# Allegro board RV233.brd
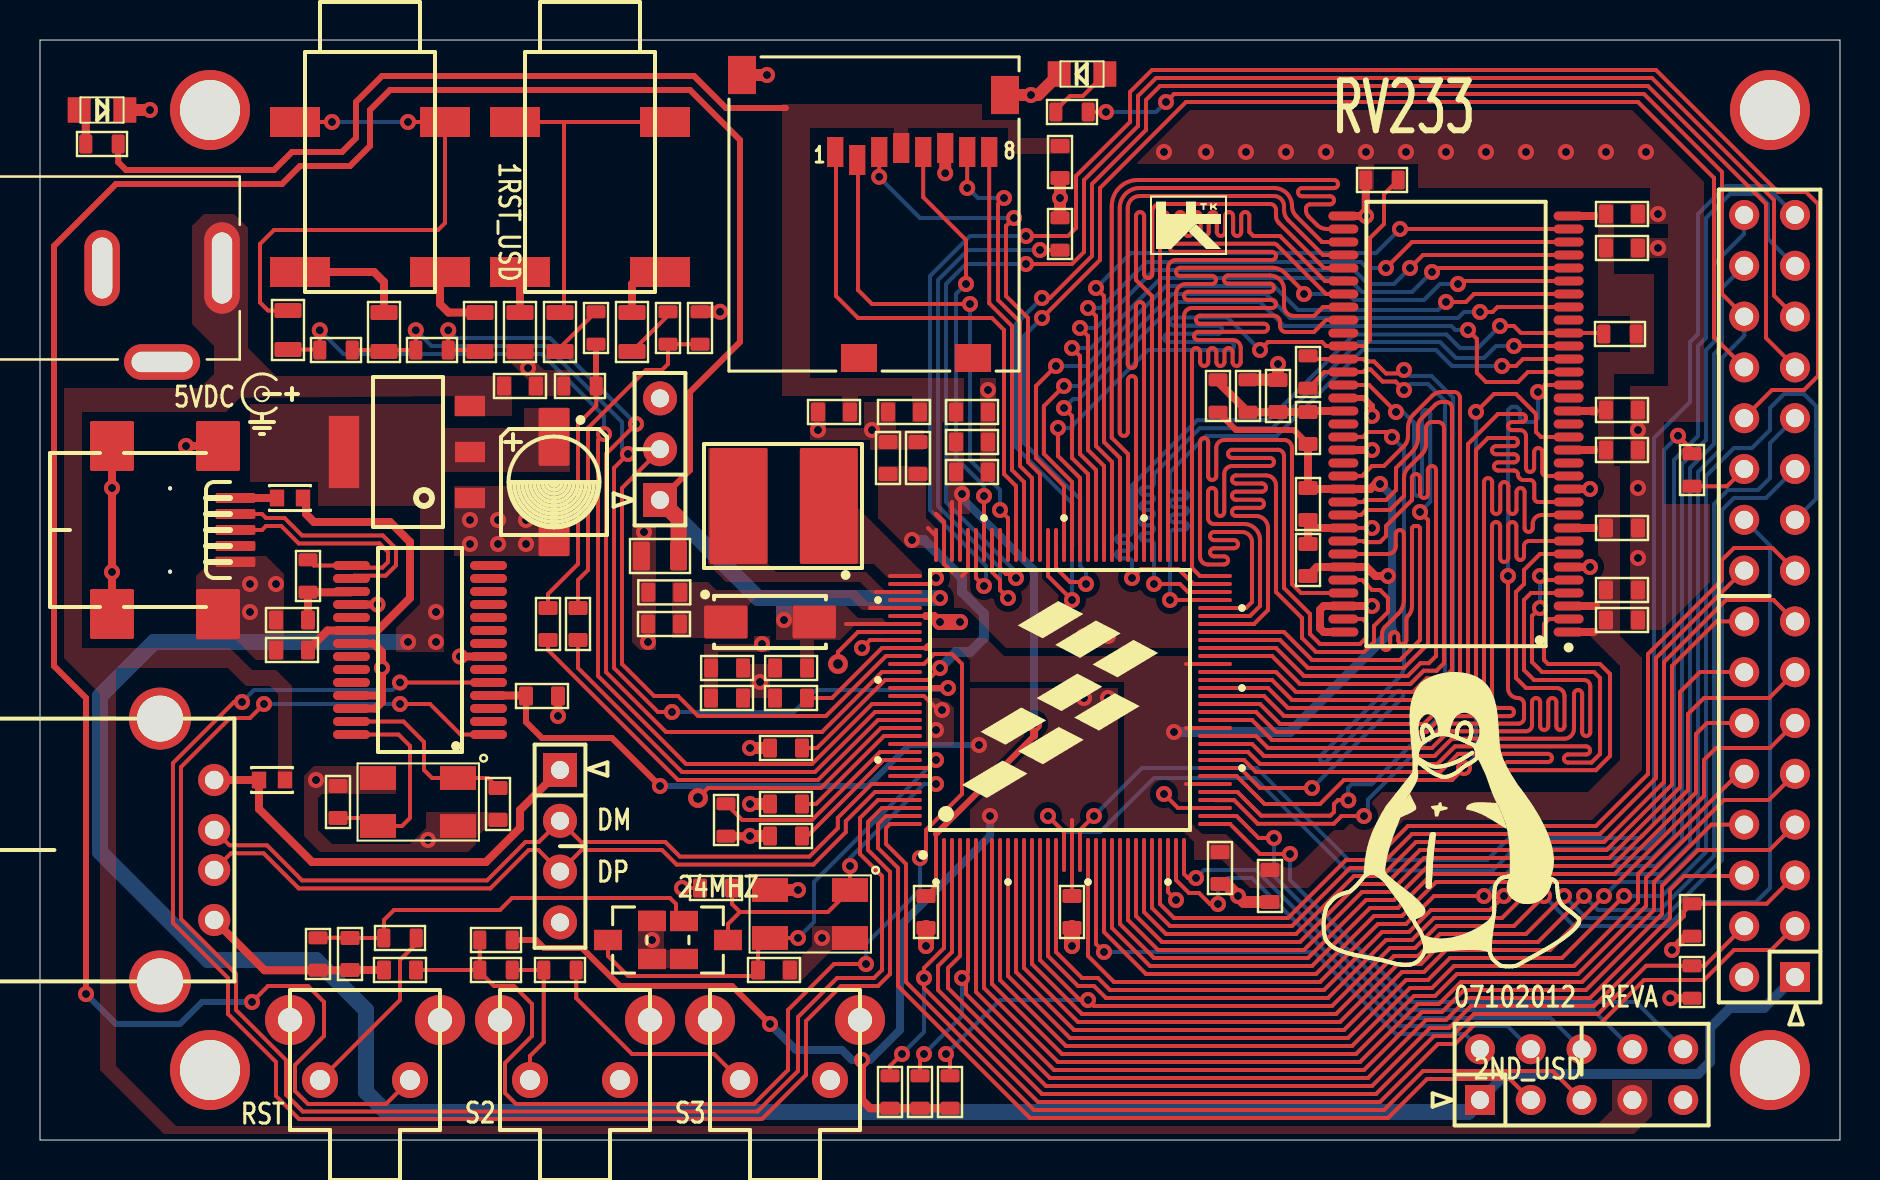
[diagram p0: board, top side]
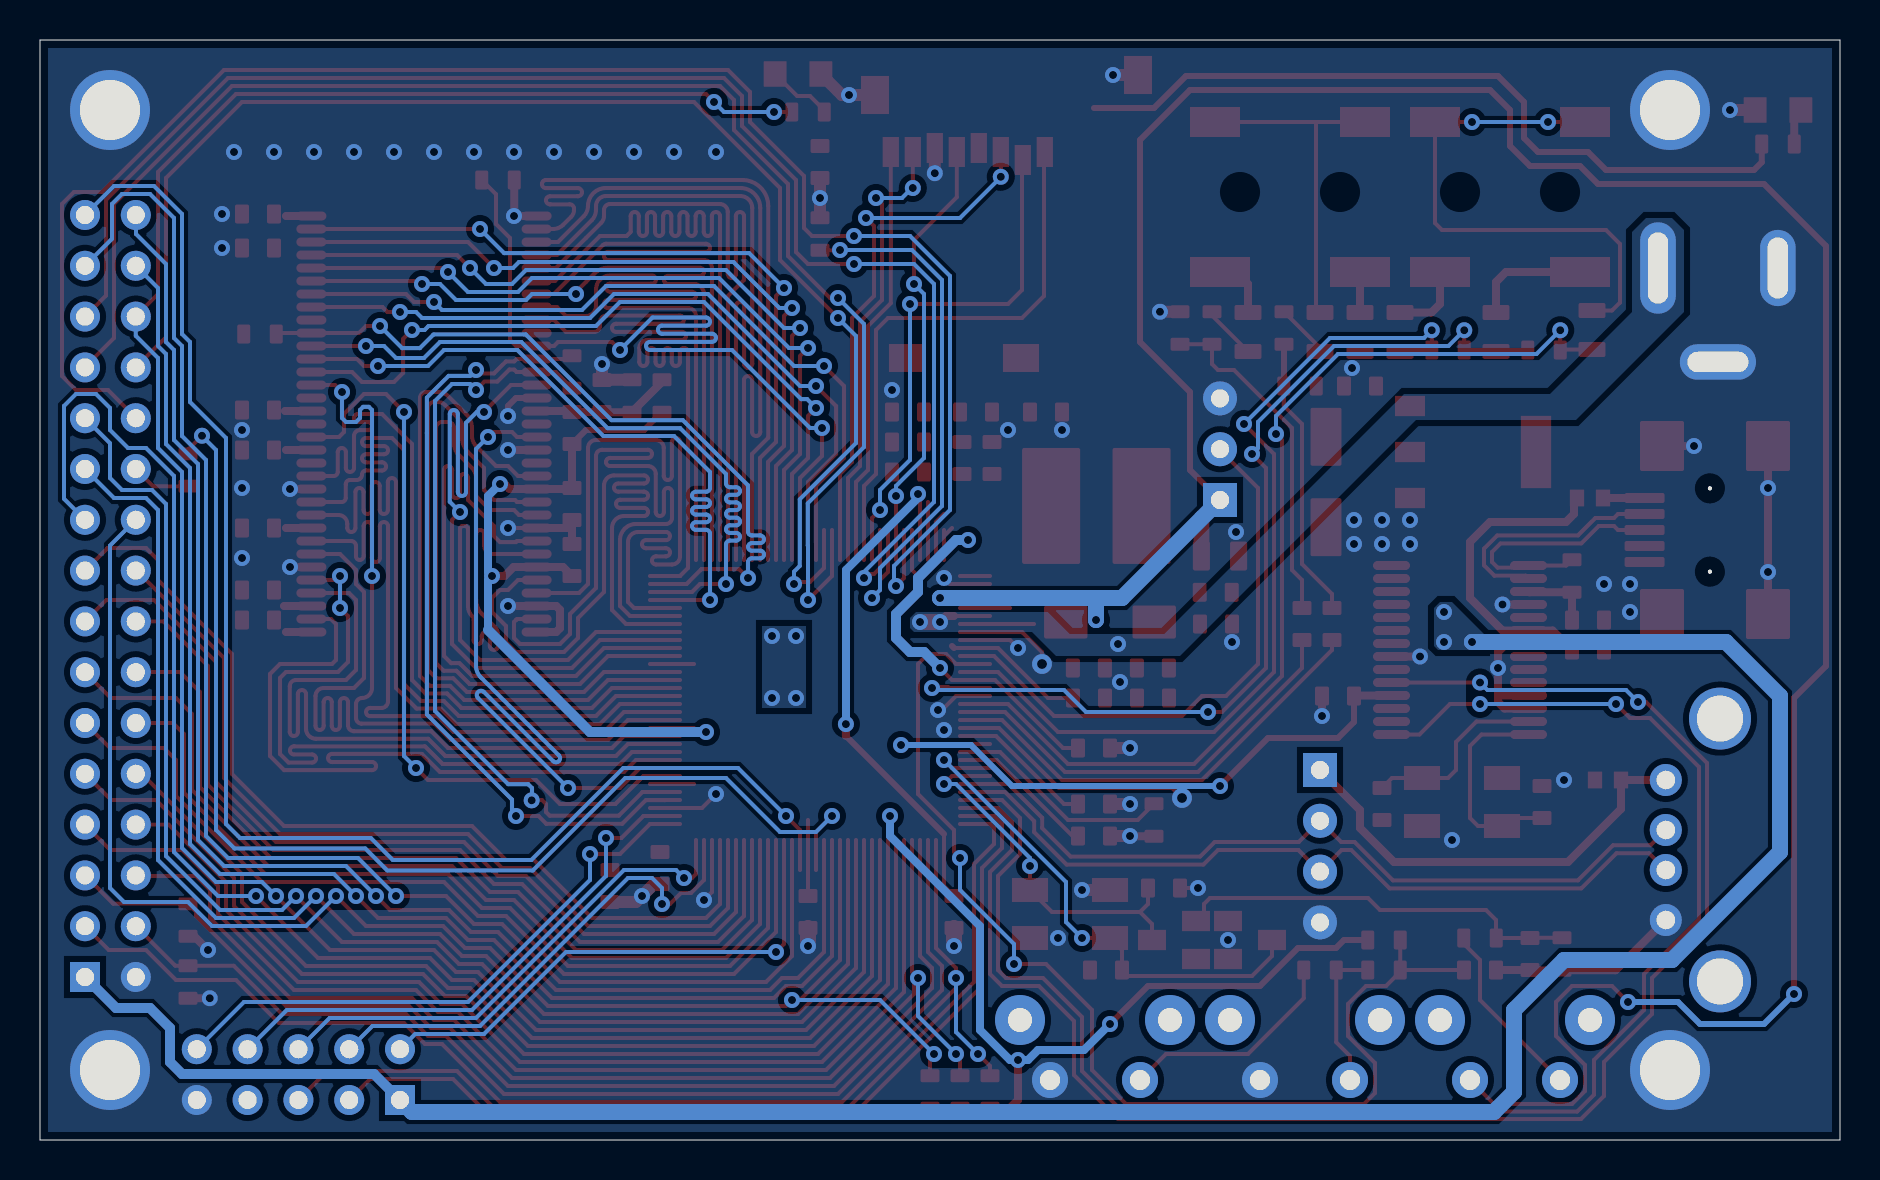
[diagram p1: board, bottom side, seen from below]

Outline 90 x 55 mm; copper layers: TOP, BOTTOM. Coordinates in mm from the lower left corner of the outline.
Outline path: 0,55 90,55 90,0 0,0 0,55

## Design rules (mm)
constraint set DEFAULT: 
net group DIFFPAIR0: nets EMI_CLK EMI_CLKN
net group EMI_ADDR: nets EMI_A00 EMI_A01 EMI_A02 EMI_A03 EMI_A04 EMI_A05 EMI_A06 EMI_A07 EMI_A08 EMI_A09 EMI_A10 EMI_A11 EMI_A12 EMI_BA0 EMI_BA1
net group EMI_CONTROL: nets EMI_CASN EMI_CE0N EMI_CKE EMI_RASN EMI_WEN
net group EMI_DATA: nets EMI_D00 EMI_D01 EMI_D02 EMI_D03 EMI_D04 EMI_D05 EMI_D06 EMI_D07 EMI_D08 EMI_D09 EMI_D10 EMI_D11 EMI_D12 EMI_D13 EMI_D14 EMI_D15 EMI_DQM0 EMI_DQM1 EMI_DQS0 EMI_DQS1

## Placement (name value [footprint] x y rotation side)
C1  100nF  [CAP0603_B1]  24 37.7 0 top
C2  100nF  [CAP0603_B1]  46.6 33.4 0 top
C3  22uF (0805)  [CAP0805_B1]  31 29.2 180 top
C4  10uF  [CAP0603_B1]  46.6 34.9 0 top
C5  33uF  [CAPAL53X54]  25.7 32.9 270 top
C6  100nF  [CAP0603_B1]  31.21 27.38 180 top
C7  10nF  [CAP0603_B1]  18 8.5 180 top
C8  100nF  [CAP0603_B1]  43.9 34.1 90 top
C10  100nF  [CAP0603_B1]  59 13.6 270 top
C11  10uF  [CAP0603_B1]  61.5 12.7 270 top
C12  10uF  [CAP0603_B1]  79.1 44.6 0 top
C13  100nF  [CAP0603_B1]  39.7 36.4 180 top
C14  100nF  [CAP0603_B1]  51.6 11.4 270 top
C15  10uF  [CAP0603_B1]  42.4 34.1 90 top
C16  10uF  [CAP0603_B1]  31.2 25.8 180 top
C17  100nF  [CAP0603_B1]  44.3 11.4 270 top
C20  100nF  [CAP0603_B1]  46.6 36.4 0 top
C22  10uF  [CAP0603_B1]  43.2 36.4 180 top
C23  1uF  [CAP0603_B1]  37.55 22.1 180 top
C24  100nF  [CAP0603_B1]  12.6 24.5 180 top
C25  100nF  [CAP0603_B1]  37.55 23.6 180 top
C27  22pF  [CAP0603_B1]  14.9 16.9 90 top
C28  10uF  [CAP0603_B1]  34.35 22.1 0 top
C29  100nF  [CAP0603_B1]  34.36 23.6 0 top
C30  100nF  [CAP0603_B1]  37.3 19.6 180 top
C31  22pF  [CAP0603_B1]  22.9 16.8 270 top
C32  100nF  [CAP0603_B1]  37.3 15.2 180 top
C33  1uF  [CAP0603_B1]  37.3 16.8 180 top
C34  22pF  [CAP0603_B1]  33.8 12.6 180 top
C35  22pF  [CAP0603_B1]  36.7 8.5 0 top
C36  100nF  [CAP0603_B1]  63.4 35.6 90 top
C37  100nF  [CAP0603_B1]  61.9 37.2 90 top
C38  100nF  [CAP0603_B1]  63.4 31.8 270 top
C39  100nF  [CAP0603_B1]  63.4 29 90 top
C40  100nF  [CAP0603_B1]  79.1 27.5 0 top
C41  100nF  [CAP0603_B1]  79.1 46.3 0 top
C42  100nF  [CAP0603_B1]  79.1 36.5 0 top
C43  100nF  [CAP0603_B1]  79.1 34.5 0 top
C44  100nF  [CAP0603_B1]  79.1 30.6 0 top
C45  100nF  [CAP0603_B1]  79.1 26 0 top
C46  100nF  [CAP0603_B1]  15.5 9.3 270 top
C47  100nF  [CAP0603_B1]  25.1 22.2 0 top
C48  100nF  [CAP0603_B1]  12.6 26 180 top
C49  1u  [CAP0603_B1]  26.9 25.8 270 top
C50  1u  [CAP0603_B1]  25.4 25.8 270 top
C51  1uF  [CAP0603_B1]  51 48.9 270 top
D1  -  [SS14]  36.5 25.9 0 top
D2  LED  [LED0805-1]  3.1 51.5 180 top
D3  LED  [LED0805-1]  52.1 53.3 0 top
FB5  Bead  [RES0805_B1]  22 40.4 90 top
FB6  Bead  [RES0805_B1]  12.4 40.5 90 top
FB7  Bead  [RES0805_B1]  17.2 40.4 90 top
FB8  Bead  [RES0805_B1]  29.6 40.4 90 top
FB9  Bead  [RES0805_B1]  26 40.4 90 top
FB10  Bead  [RES0805_B1]  24 40.4 90 top
HL1  HOLE  [HOLE-VIA]  8.5 51.5 0 top
HL2  HOLE  [HOLE-VIA]  86.5 51.5 0 top
HL3  HOLE  [HOLE-VIA]  86.5 3.5 0 top
HL4  HOLE  [HOLE-VIA]  8.5 3.5 0 top
J1  CON32A  [HDR254M-2X16]  87.75 8.15 90 top
J2  POWER_JACK  [CONN3-PWR-PJ102A]  9.1 43.6 180 top
J3  CON10A  [HDR254M-2X5]  72 2 0 top
J4  HP_OUT  [AUDIO_SMD_3P]  16.5 49.4 270 top
J5  LINE_IN  [AUDIO_SMD_3P]  27.5 49.4 270 top
J6  USB_MB  [HIROSE-US60-MB-5ST]  0.5 30.5 270 top
J7  USB_A  [EDAC-690-004]  6 14.5 270 top
J8  CON4  [HDR254M-1X4]  26 18.5 270 top
J9  CON3  [HDR254M-1X3]  31 32 90 top
L1  15uH  [INDUCTOR50X50]  37.18 31.7 180 top
L2  120OHM  [0603_CC]  12.5 32.1 180 top
L3  120OHM  [0603_CC]  11.6 18 180 top
NOREF  -  []  94 0 90 top
NOREF#2  -  []  0 59 0 top
NOREF#3  -  []  55.55 44.3 0 top
NOREF#4  -  []  46.1 17.1 0 top
NOREF#5  -  []  -1 45 0 top
NOREF#6  -  []  64.1 2.6 0 top
Q1  2SC1815-HF  [SOT-23]  33.3 10 270 top
Q2  2SC1815-HF  [SOT-23]  29.5 10 90 top
R4  100K  [RES0603_B1]  51 45.3 90 top
R5  47K  [RES0603_B1]  79 40.3 180 top
R6  1K  [RES0603_B1]  58.9 37.2 90 top
R7  1K  [RES0603_B1]  60.4 37.2 90 top
R8  100R (DNP)  [RES0603_B1]  63.4 38.4 90 top
R9  47K  [RES0603_B1]  67.1 48 180 top
R10  1K  [RES0603_B1]  18 10.1 180 top
R11  1K  [RES0603_B1]  13.9 9.3 270 top
R12  33R (DNP)  [RES0603_B1]  82.6 33.5 90 top
R13  47K  [RES0603_B1]  45.5 2.4 90 top
R14  47K  [RES0603_B1]  44 2.4 90 top
R15  47K  [RES0603_B1]  42.5 2.4 90 top
R16  47K  [RES0603_B1]  82.6 7.9 270 top
R17  47K  [RES0603_B1]  82.6 11 270 top
R18  10K  [RES0603_B1]  22.8 10 180 top
R19  0R  [RES0603_B1]  22.8 8.5 0 top
R20  910R  [RES0603_B1]  26 8.5 0 top
R23  100R  [RES0603_B1]  14.8 39.5 0 top
R24  100R  [RES0603_B1]  19.6 39.5 180 top
R25  10K  [RES0603_B1]  31.4 40.6 270 top
R26  10K  [RES0603_B1]  27.8 40.6 270 top
R27  4K7  [RES0603_B1]  27 37.7 180 top
R28  4K7  [RES0603_B1]  33 40.6 90 top
R39  100K  [RES0603_B1]  34.3 16 270 top
R40  1K5  [RES0603_B1]  13.4 28.2 90 top
R51  1K  [RES0603_B1]  3.1 49.8 180 top
R52  1K  [RES0603_B1]  51.6 51.4 180 top
S1  RST  [BUTTON_RST]  14 3 0 top
S2  S2  [BUTTON_RST]  24.5 3 0 top
S3  S3  [BUTTON_RST]  35 3 0 top
U1  i.MX233-128QFP  [LQFP128]  51 22 90 top
U2  HY5DU121622DTP-J  [TSOP66]  70.8 35.8 90 top
U3  SD/MMC SKT  [CON_SDCARD_12F_43_SM_RA]  41.7 46.3 0 top
U4  LD1117-3V3  [SSOT-223]  18.4 34.4 180 top
U5  -  [PL2303HX]  19 24.5 90 top
Y1  24MHz  [XTAL50X320X110N_MOD]  38.5 11.3 180 top
Y2  12MHz  [XTAL50X320X110N_MOD]  18.9 16.9 180 top

## Library data of the parts
C1-C4 C6-C8 C10-C17 C20 C22 C23 C25 C28-C30 C32-C46 C49-C51 = CAP NP_0: User Part Number: pn; Tolerance: RichardLC
C5 = CAPACITOR POL_1: User Part Number: pn; Tolerance: RichardLC
C24 C27 C31 C47 C48 = C1005_0: User Part Number: pn; Tolerance: RichardLC
D1 = DIODE SCHOTTKY_1: User Part Number: pn; Tolerance: RichardLC
D2 D3 = LED_0: Tolerance: X; User Part Number: X
FB5-FB10 L1 = INDUCTOR/SM_0: User Part Number: pn; Tolerance: RichardLC
HL1-HL4 = CON1: User Part Number: pn; Tolerance: RichardLC
J1 = CON32A: User Part Number: pn; Tolerance: RichardLC
J2 = POWER_JACK: Tolerance: X; User Part Number: X
J3 = CON10A: User Part Number: pn; Tolerance: RichardLC
J4 = PHONEJACK STEREO SW_5: User Part Number: pn; Tolerance: RichardLC
J5 = PHONEJACK STEREO SW_6: User Part Number: pn; Tolerance: RichardLC
J6 = CON9_2: User Part Number: pn; Tolerance: RichardLC
J7 = USB_A: User Part Number: pn; Tolerance: RichardLC
J8 = CON4: User Part Number: pn; Tolerance: RichardLC
J9 = CON3: User Part Number: pn; Tolerance: RichardLC
L2 L3 = BEAD
Q1 Q2 = 2N3904_0
R4-R20 R23-R28 R39 R40 R51 R52 = R_0: User Part Number: pn; Tolerance: RichardLC
S1-S3 = SW PUSHBUTTON_1: User Part Number: pn; Tolerance: RichardLC
U1 = stimpy_228: User Part Number: pn; Tolerance: RichardLC
U2 = MT48LC16M8A2_0: User Part Number: pn; Tolerance: RichardLC
U3 = CONN_SDCARD_1X12_F
U4 = LD1117
U5 = PL2303HX: User Part Number: pn; Tolerance: RichardLC
Y1 Y2 = ZTA_0

## Footprints (pads in the part's own frame, mm; a bottom-side part is the same pattern mirrored in y, then rotated)
0603_CC
  rect 0.711x0.838 smd: 1(-0.65,0) 2(0.65,0)
AUDIO_SMD_3P
  round 0 hole 1.4 unplated: (2,2.5) (2,-2.5)
  rect 1.5x3 smd: 1(6,-3.5) 2(6,3.5)
  rect 1.5x2.5 smd: 3(-1.5,3.75) 4(-1.5,-3.75)
BUTTON_RST
  round 1.8 hole 1: 1(0,0) 2(4.5,0)
  round 2.5 hole 1.2: 3(6,3) 4(-1.5,3)
CAP0603_B1
  custom 0.7x0.95 smd: 1(-0.8,0) 2(0.8,0)
CAP0805_B1
  custom 0.85x1.45 smd: 1(-0.93,0) 2(0.93,0)
CAPAL53X54
  custom 2.9x1.55 smd: 1(-2.26,0) 2(2.26,0)
CON_SDCARD_12F_43_SM_RA
  rect 0.813x1.499 smd: 1(-1.94,3.1) 2(-0.84,2.7) 3(0.26,3.1) 4(1.36,3.3) 5(2.46,3.1) 6(3.56,3.3) 7(4.66,3.1) 8(5.76,3.1)
  rect 1.397x1.905 smd: SH1(6.55,5.95) SH2(-6.6,6.95)
  rect 1.803x1.397 smd: SH3(4.95,-7.2) SH4(-0.75,-7.2)
CONN3-PWR-PJ102A
  oval 1.778x4.572 hole 1.016x3.556: 1(0,0)
  oval 1.778x3.81 hole 1.016x3.048: 2(5.994,0)
  oval 3.81x1.778 hole 3.048x1.016: 3(2.997,4.699)
EDAC-690-004
  round 1.6 hole 0.92: 1(-3.5,2.71) 2(-1,2.71) 3(1,2.71) 4(3.5,2.71)
  round 3.1 hole 2.3: S1(-6.57,0) S2(6.57,0)
HDR254M-1X3
  rect 1.7x1.7 hole 0.9: 1(0,0)
  round 1.7 hole 0.9: 2(2.54,0) 3(5.08,0)
HDR254M-1X4
  rect 1.7x1.7 hole 0.9: 1(0,0)
  round 1.7 hole 0.9: 2(2.54,0) 3(5.08,0) 4(7.62,0)
HDR254M-2X5
  rect 1.5x1.5 hole 0.9: 1(0,0)
  round 1.5 hole 0.9: 2(0,2.54) 3(2.54,0) 4(2.54,2.54) 5(5.08,0) 6(5.08,2.54) 7(7.62,0) 8(7.62,2.54) 9(10.16,0) 10(10.16,2.54)
HDR254M-2X16
  rect 1.5x1.5 hole 0.9: 1(0,0)
  round 1.5 hole 0.9: 2(0,2.54) 3(2.54,0) 4(2.54,2.54) 5(5.08,0) 6(5.08,2.54) 7(7.62,0) 8(7.62,2.54) 9(10.16,0) 10(10.16,2.54) 11(12.7,0) 12(12.7,2.54) 13(15.24,0) 14(15.24,2.54) 15(17.78,0) 16(17.78,2.54) 17(20.32,0) 18(20.32,2.54) 19(22.86,0) 20(22.86,2.54) 21(25.4,0) 22(25.4,2.54) 23(27.94,0) 24(27.94,2.54) 25(30.48,0) 26(30.48,2.54) 27(33.02,0) 28(33.02,2.54) 29(35.56,0) 30(35.56,2.54) 31(38.1,0) 32(38.1,2.54)
HIROSE-US60-MB-5ST
  round 0.2 hole 0.9 unplated: (-2.083,6.005) (2.083,6.005)
  custom 0.5x2 smd: 1(-1.6,9.271) 2(-0.8,9.271) 3(0,9.271) 4(0.8,9.271) 5(1.6,9.271)
  custom 2.5x2.2 smd: 6(-4.2,3.1) 7(4.2,3.1) 8(-4.2,8.4) 9(4.2,8.4)
HOLE-VIA
  round 0.1 hole 0.3: (-1.35,0) (-0.955,0.955) (-0.955,-0.955) (0,1.35) (0,-1.35) (0.955,0.955) (0.955,-0.955) (1.35,0) (1.35,0)
  round 4 hole 3: 1(0,0)
INDUCTOR50X50
  custom 2.9x5.8 smd: 1(-2.26,0) 2(2.26,0)
LED0805-1
  rect 1.143x1.27 smd: 1(-1.143,0) 2(1.143,0)
LQFP128
  oval 1.7x0.2 smd: 1(-7.75,6.2) 2(-7.75,5.8) 3(-7.75,5.4) 4(-7.75,5) 5(-7.75,4.6) 6(-7.75,4.2) 7(-7.75,3.8) 8(-7.75,3.4) 9(-7.75,3) 10(-7.75,2.6) 11(-7.75,2.2) 12(-7.75,1.8) 13(-7.75,1.4) 14(-7.75,1) 15(-7.75,0.6) 16(-7.75,0.2) 17(-7.75,-0.2) 18(-7.75,-0.6) 19(-7.75,-1) 20(-7.75,-1.4) 21(-7.75,-1.8) 22(-7.75,-2.2) 23(-7.75,-2.6) 24(-7.75,-3) 25(-7.75,-3.4) 26(-7.75,-3.8) 27(-7.75,-4.2) 28(-7.75,-4.6) 29(-7.75,-5) 30(-7.75,-5.4) 31(-7.75,-5.8) 32(-7.75,-6.2) 65(7.75,-6.2) 66(7.75,-5.8) 67(7.75,-5.4) 68(7.75,-5) 69(7.75,-4.6) 70(7.75,-4.2) 71(7.75,-3.8) 72(7.75,-3.4) 73(7.75,-3) 74(7.75,-2.6) 75(7.75,-2.2) 76(7.75,-1.8) 77(7.75,-1.4) 78(7.75,-1) 79(7.75,-0.6) 80(7.75,-0.2) 81(7.75,0.2) 82(7.75,0.6) 83(7.75,1) 84(7.75,1.4) 85(7.75,1.8) 86(7.75,2.2) 87(7.75,2.6) 88(7.75,3) 89(7.75,3.4) 90(7.75,3.8) 91(7.75,4.2) 92(7.75,4.6) 93(7.75,5) 94(7.75,5.4) 95(7.75,5.8) 96(7.75,6.2)
  oval 0.2x1.7 smd: 33(-6.2,-7.75) 34(-5.8,-7.75) 35(-5.4,-7.75) 36(-5,-7.75) 37(-4.6,-7.75) 38(-4.2,-7.75) 39(-3.8,-7.75) 40(-3.4,-7.75) 41(-3,-7.75) 42(-2.6,-7.75) 43(-2.2,-7.75) 44(-1.8,-7.75) 45(-1.4,-7.75) 46(-1,-7.75) 47(-0.6,-7.75) 48(-0.2,-7.75) 49(0.2,-7.75) 50(0.6,-7.75) 51(1,-7.75) 52(1.4,-7.75) 53(1.8,-7.75) 54(2.2,-7.75) 55(2.6,-7.75) 56(3,-7.75) 57(3.4,-7.75) 58(3.8,-7.75) 59(4.2,-7.75) 60(4.6,-7.75) 61(5,-7.75) 62(5.4,-7.75) 63(5.8,-7.75) 64(6.2,-7.75) 97(6.2,7.75) 98(5.8,7.75) 99(5.4,7.75) 100(5,7.75) 101(4.6,7.75) 102(4.2,7.75) 103(3.8,7.75) 104(3.4,7.75) 105(3,7.75) 106(2.6,7.75) 107(2.2,7.75) 108(1.8,7.75) 109(1.4,7.75) 110(1,7.75) 111(0.6,7.75) 112(0.2,7.75) 113(-0.2,7.75) 114(-0.6,7.75) 115(-1,7.75) 116(-1.4,7.75) 117(-1.8,7.75) 118(-2.2,7.75) 119(-2.6,7.75) 120(-3,7.75) 121(-3.4,7.75) 122(-3.8,7.75) 123(-4.2,7.75) 124(-4.6,7.75) 125(-5,7.75) 126(-5.4,7.75) 127(-5.8,7.75) 128(-6.2,7.75)
PL2303HX
  oval 0.45x1.85 smd: 1(-4.225,-3.425) 2(-3.575,-3.425) 3(-2.925,-3.425) 4(-2.275,-3.425) 5(-1.625,-3.425) 6(-0.975,-3.425) 7(-0.325,-3.425) 8(0.325,-3.425) 9(0.975,-3.425) 10(1.625,-3.425) 11(2.275,-3.425) 12(2.925,-3.425) 13(3.575,-3.425) 14(4.225,-3.425) 15(4.225,3.425) 16(3.575,3.425) 17(2.925,3.425) 18(2.275,3.425) 19(1.625,3.425) 20(0.975,3.425) 21(0.325,3.425) 22(-0.325,3.425) 23(-0.975,3.425) 24(-1.625,3.425) 25(-2.275,3.425) 26(-2.925,3.425) 27(-3.575,3.425) 28(-4.225,3.425)
RES0603_B1
  custom 0.65x0.95 smd: 1(-0.812,0) 2(0.812,0)
RES0805_B1
  custom 0.75x1.35 smd: 1(-0.975,0) 2(0.975,0)
SOT-23
  rect 1.016x1.397 smd: 1(-0.95,-1.1) 2(0.95,-1.1) 3(0,1.1)
SS14
  custom 2.17x1.65 smd: A(2.21,0) C(-2.21,0)
SSOT-223
  rect 1.5x1.02 smd: 1(-3.1,2.3) 2(-3.1,0) 3(-3.1,-2.3)
  rect 1.52x3.61 smd: 4(3.2,0)
TSOP66
  oval 0.45x1.5 smd: 1(-10.4,-5.632) 2(-9.75,-5.632) 3(-9.1,-5.632) 4(-8.45,-5.632) 5(-7.8,-5.632) 6(-7.15,-5.632) 7(-6.5,-5.632) 8(-5.85,-5.632) 9(-5.2,-5.632) 10(-4.55,-5.632) 11(-3.9,-5.632) 12(-3.25,-5.632) 13(-2.6,-5.632) 14(-1.95,-5.632) 15(-1.3,-5.632) 16(-0.65,-5.632) 17(0,-5.632) 18(0.65,-5.632) 19(1.3,-5.632) 20(1.95,-5.632) 21(2.6,-5.632) 22(3.25,-5.632) 23(3.9,-5.632) 24(4.55,-5.632) 25(5.2,-5.632) 26(5.85,-5.632) 27(6.5,-5.632) 28(7.15,-5.632) 29(7.8,-5.632) 30(8.45,-5.632) 31(9.1,-5.632) 32(9.75,-5.632) 33(10.4,-5.632) 34(10.4,5.632) 35(9.75,5.632) 36(9.1,5.632) 37(8.45,5.632) 38(7.8,5.632) 39(7.15,5.632) 40(6.5,5.632) 41(5.85,5.632) 42(5.2,5.632) 43(4.55,5.632) 44(3.9,5.632) 45(3.25,5.632) 46(2.6,5.632) 47(1.95,5.632) 48(1.3,5.632) 49(0.65,5.632) 50(0,5.632) 51(-0.65,5.632) 52(-1.3,5.632) 53(-1.95,5.632) 54(-2.6,5.632) 55(-3.25,5.632) 56(-3.9,5.632) 57(-4.55,5.632) 58(-5.2,5.632) 59(-5.85,5.632) 60(-6.5,5.632) 61(-7.15,5.632) 62(-7.8,5.632) 63(-8.45,5.632) 64(-9.1,5.632) 65(-9.75,5.632) 66(-10.4,5.632)
XTAL50X320X110N_MOD
  rect 1.803x1.194 smd: 1(-2,-1.2) 2(2,-1.2) 3(2,1.2) 4(-2,1.2)

## Nets
3V3_EXT: C5.1 J1.1 J3.1 U4.2(VOUT) U4.4
5V_EXT: C1.1 C28.1 C29.1 J2.1(TIP) J3.7 L3.1 U1.102 U4.3
GND: C1.2 C2.2 C3.2 C4.2 C5.2 C6.2 C7.2 C8.2 C10.2 C11.2 C12.2 C13.2 C14.2 C15.2 C16.2 C17.2 C20.2 C22.2 C23.2 C24.2 C25.2 C27.2 C28.2 C29.2 C30.2 C31.2 C32.2 C33.2 C34.2 C35.2 C37.2 C38.2 C39.2 C40.2 C41.2 C42.2 C43.2 C44.2 C45.2 C46.2 C47.2 C48.2 C51.2 D2.1 D3.1 FB10.1 HL1.1 HL2.1 HL3.1 HL4.1 J1.2 J2.2 J2.3 J3.9 J6.5 J6.6 J6.7 J6.8 J6.9 J7.4 J8.4 J9.3 Q1.2(E) Q2.1 Q2.2(E) R4.2 R7.2 R9.2 R11.2 R16.2 R17.2 R27.2 R28.2 R39.2 S2.2 S3.2 U1.30 U1.35 U1.98 U1.105 U1.112 U1.118 U2.6 U2.12 U2.34 U2.48 U2.52 U2.58 U2.64 U2.66 U3.6(VSS) U3.SH1 U3.SH2 U4.1 U5.7 U5.18 U5.21 U5.25 U5.26 Y1.2 Y1.4 Y2.2 Y2.4
VBUS_USB: C24.1 L2.1 U5.20
VDD4P2: C6.1 C16.1 D1.C U1.101
VDDA (1.8V): C8.1 C15.1 C30.1 U1.96 U1.110
VDDD (1.2V): C2.1 C4.1 C17.1 U1.1 U1.93 U1.94
VDDIO (3.3V): C13.1 C14.1 C20.1 C22.1 C47.1 C51.1 R13.1 R14.1 R15.1 R18.1 R51.1 U1.18 U1.92 U1.95 U3.4 U5.4
VDDIO_DRAM: C10.1 C11.1 C12.1 C23.1 C36.1 C38.1 C39.1 C40.1 C41.1 C42.1 C43.1 C44.1 C45.1 R5.1 R6.1 U1.38 U1.45 U1.53 U1.106 U2.1 U2.3 U2.9 U2.15 U2.18 U2.33 U2.55 U2.61
VDDXTAL (1.0V): C32.1 U1.120
EMI_A00: U1.76 U2.29
EMI_A01: U1.75 U2.30
EMI_A02: U1.74 U2.31
EMI_A03: U1.73 U2.32
EMI_A04: U1.72 U2.35
EMI_A05: U1.71 U2.36
EMI_A06: U1.70 U2.37
EMI_A07: U1.69 U2.38
EMI_A08: U1.68 U2.39
EMI_A09: U1.67 U2.40
EMI_A10: U1.66 U2.28
EMI_A11: U1.65 U2.41
EMI_A12: U1.64 U2.42
EMI_BA0: U1.79 U2.26
EMI_BA1: U1.80 U2.27
EMI_CASN: U1.61 U2.22
EMI_CE0N: R5.2 U1.63 U2.24
EMI_CKE: R9.1 U1.78 U2.44
EMI_CLK: R8.2 U1.36 U2.45
EMI_CLKN: R8.1 U1.37 U2.46
EMI_D00: U1.41 U2.2
EMI_D01: U1.43 U2.4
EMI_D02: U1.42 U2.5
EMI_D03: U1.44 U2.7
EMI_D04: U1.47 U2.8
EMI_D05: U1.48 U2.10
EMI_D06: U1.49 U2.11
EMI_D07: U1.50 U2.13
EMI_D08: U1.51 U2.54
EMI_D09: U1.52 U2.56
EMI_D10: U1.54 U2.57
EMI_D11: U1.55 U2.59
EMI_D12: U1.57 U2.60
EMI_D13: U1.58 U2.62
EMI_D14: U1.60 U2.63
EMI_D15: U1.59 U2.65
EMI_DQM0: U1.46 U2.20
EMI_DQM1: U1.56 U2.47
EMI_DQS0: U1.39 U2.16
EMI_DQS1: U1.40 U2.51
EMI_RASN: U1.62 U2.23
EMI_WEN: U1.77 U2.21(W\E\)
GPMI_ALE: J1.29 U1.20
GPMI_CE0N: J1.25 U1.82
GPMI_CE1N: J1.26 U1.81
GPMI_CLE: J1.31 U1.19
GPMI_D00: J1.11 U1.22
GPMI_D01: J1.12 U1.23
GPMI_D02: J1.13 U1.24
GPMI_D03: J1.14 U1.25
GPMI_D04: J1.15 U1.27
GPMI_D05: J1.16 U1.26
GPMI_D06: J1.17 U1.29
GPMI_D07: J1.18 U1.28
GPMI_R/B#0: J3.6 U1.32
GPMI_R/B#1: J3.2 U1.21
GPMI_RE#: J3.4 U1.31
GPMI_WE#:: J3.10 U1.33
GPMI_WP#: J3.8 U1.34
HP_L: FB6.1 R23.1 U1.113
HP_R: FB5.1 R24.1 U1.109
HP_VGND: FB7.1 R23.2 R24.2 U1.111
I2C_SCL: J3.3 U1.127
I2C_SDA: J3.5 U1.128
LCD_CS: J1.19 U1.10
LCD_D00: J1.3 R15.2 U1.2
LCD_D01: J1.4 R16.1 U1.3
LCD_D02: J1.5 R17.1 U1.4
LCD_D03: J1.6 R14.2 U1.5
LCD_D04: J1.7 U1.6
LCD_D05: J1.8 U1.7
LCD_D06: J1.9 U1.8
LCD_D07: J1.10 U1.9
LCD_DOTCLK: R12.2 U1.17
LCD_EN: J1.28 R52.1 U1.11
LCD_HSYNC: J1.30 U1.15
LCD_RESET: J1.23 U1.12
LCD_RS: J1.20 R13.2 U1.14
LCD_VSYNC: J1.32 U1.16
LCD_WR: J1.21 U1.13
LI-ION_BATTERY: C3.1 C25.1 D1.A J9.1 S1.2 U1.100 U1.103
LINE_IN_L: C50.2 U1.115
LINE_IN_R: C49.2 U1.114
LRADC0: C7.1 R18.2 R19.1 U1.108
LRADC1: J9.2 U1.107
MIC: U1.116
PSWITCH: R39.1 U1.119
PWM0: U1.125 U5.1
PWM1: U1.126 U5.5
PWM2: J1.24 U1.91
SERIAL_JTAG: R4.1 U1.89
SSP1_CMD: U1.83 U3.3
SSP1_DATA0: U1.84 U3.7
SSP1_DATA1: U1.85 U3.8
SSP1_DATA2: U1.86 U3.1
SSP1_DATA3: U1.87 U3.2
SSP1_DETECT: J1.27 U1.88
SSP1_SCK: U1.90 U3.5
USB_D+: J7.3 J8.3 U1.124
USB_D-: J7.2 J8.2 U1.123
VDAC1: U1.104
XTAL_IN: C34.1 Q1.3 U1.122 Y1.1
XTAL_OUT: C35.1 Q2.3 U1.121(XTALO) Y1.3
N37298: L1.1 U1.97
N37305: L1.2 U1.99
N50407: C33.1 U1.117
N54014: C36.2 C37.1 R6.2 R7.1 U2.49
N97880: C46.1 Q1.1 R10.2 R11.1
N16793165: J6.2 U5.16
N16793167: J6.3 R40.2 U5.15
N16793210: C48.1 R40.1 U5.17
N16793237: C27.1 U5.28 Y2.3
N16793563: C31.1 U5.27 Y2.1
N16801292: J1.22 R12.1
N16805543: FB8.2 J5.2
N16805561: FB9.2 J5.3 J5.4
N16805563: FB10.2 J5.1
N16805589: FB8.1 R25.1
N16805607: FB9.1 R26.1
N16805609: C49.1 R25.2 R28.1
N16805613: C50.1 R26.2 R27.1
N16806139: FB7.2 J4.1
N16806142: FB6.2 J4.3 J4.4
N16806154: FB5.2 J4.2
N16806654: R10.1 S1.1
N16806833: R19.2 R20.1 S2.1
N16806835: R20.2 S3.1
N16808420: J7.1(VBUS) J8.1 L3.2
N16808921: J6.1(VBUS) L2.2
N16811750: D2.2 R51.2
N16813899: D3.2 R52.2

Pads without a net: J6 4; J7 S1 S2; S1 3 4; S2 3 4; S3 3 4; U2 14 17 19 25 43 50 53; U3 SH3 SH4; U5 2 3 6 8 9 10 11 12 13 14 19 22 23 24

## Via types
v1: diameter 0.8, hole 0.4, TOP to BOTTOM, 201 vias
v2: diameter 0.991, hole 0.495, TOP to BOTTOM, 2 vias

## Routing (per net, layer and track width the routed paths; a pad name or vN(x,y) marks a point on that pad's centre or on a via; arc(x,y) is an arc through that point)
3V3_EXT: length 120.6
  BOTTOM w0.5: J1.1 86.2,6.6 84.5,6.6 83.5,5.6 83.5,3.9 82.9,3.3 73.3,3.3 J3.1
  BOTTOM w0.8: v1(18.4,24.9) 5.7,24.9 3,22.2 3,14.4 8.4,9 13.8,9 16.3,6.5 16.3,2.4 17.3,1.4 71.4,1.4 J3.1
  vias: v1(19.8,26.4) v1(19.8,24.9)
5V_EXT: length 2.9
  TOP w0.2: 44.3,26.2 U1.102
  TOP w0.4: v1(45,25.9) 44.7,26.2 44.3,26.2
  TOP w0.8: v1(46,25.9) v1(45,25.9)
  vias: v1(36.1,24.8)
GND: length 86.5
  TOP w0.2: v1(41.1,24.6) 41.5,25 U1.105 ; v1(56.8,12) 56.4,12.4 U1.30 ; C34.2 v1(32.1,12.6) ; U1.35 56.9,16.6 v1(56.2,17.3) ; 44.8,21.6 44.2,22.2 U1.112 ; 44.4,19.8 U1.118
  TOP w0.203: U2.58 v1(66.6,30.6) ; U1.98 44.5,27.8 44.8,28.1 v1(44.8,28.1)
  TOP w0.3: v1(66.6,36.2) 66.6,36.7 66.2,37.1 U2.48
  TOP w0.4: 17.1,22.2 v1(17.1,23.6) 17.1,24.4 16.67,24.82 U5.21 ; 17.1,22.2 17.08,22.23 15.58,22.23 ; 17.1,22.2 17.1,21.9 16.77,21.57 U5.26 ; U2.34 v1(66.3,46.2) 66.29,46.21 R9.2 ; U5.7 v1(21,24.18) ; R16.2 v1(81.51,7.09) ; R39.2 35.49,15.19 v1(35.5,15.2) ; C47.2 v1(25.9,21.2) ; U2.12 v1(77.5,32.55) ; C7.2 C46.2 15.49,8.49 R11.2 11.22,8.49 J7.4 ; J6.8 v1(7.3,34.7) ; C38.2 63.4,30.6 ; 63.4,30.6 U2.58 ; 63.4,30.6 C39.2 ; R17.2 82.29,10.19 v1(81.6,9.5) ; 61.89,38.01 C37.2 ; U5.18 v1(16.88,26.77) ; U2.52 v1(66.6,34.5) ; J6.6 v1(3.6,32.6) v1(3.6,28.4) J6.7 ; v1(66.6,26.7) U2.64 64.19,26.7 64,26.51 64,25.59 64.19,25.4 U2.66 ; U2.6 v1(77.5,28.65)
  TOP w0.6: U3.SH1 v1(49.55,52.25) 49.91,52.25 50.96,53.3 ; C30.2 v1(35.5,19.6) ; D2.1 v1(5.5,51.5) ; C11.2 60.2,11.9 v1(59.9,12.2) 59.3,12.8 C10.2 ; R7.2 61.89,38.01 ; R28.2 v1(34,41.41) ; C32.2 v1(35.5,15.2) ; R4.2 v1(51,47.1) C51.2 ; U3.6 v1(45.26,48.34) ; v1(61.9,38.8) C37.2 ; C33.2 v1(35.5,16.8) ; U3.SH2 v1(36.35,53.25) ; Y1.2 v1(37.9,12.5)
  TOP w0.8: C14.2 v1(51.6,9.7) ; C17.2 v1(44.3,9.7)
  vias: v1(10.5,27.8) v1(10.5,26.4) v1(11.8,27.8) v1(13.8,18) v1(19.4,15) v1(21.5,31) v1(21.5,29.8) v1(22.9,31) v1(22.9,29.8) v1(24.3,31) v1(24.3,29.8) v1(24.4,38.6) v1(30.2,30.4) v1(30.4,24.9) v1(30.6,10) v1(36,22.9) v1(38.9,35.5) v1(39.1,10.1) v1(41.6,35.5) v1(44.8,20.5) v1(45.1,21.5) v1(47.4,37.5) v1(56.2,49.4) v1(58.3,49.4) v1(60.3,49.4) v1(62.3,49.4) v1(64.3,49.4) v1(66.3,49.4) v1(68.3,49.4) v1(70.3,49.4) v1(72.3,49.4) v1(74.3,49.4) v1(76.3,49.4) v1(78.3,49.4) v1(79.9,35.5) v1(79.9,32.6) v1(79.9,29.1) v1(80.3,49.4) v1(80.9,46.3) v1(80.9,44.6)
VBUS_USB: length 15.6
  TOP w0.4: L2.1 13.3,31.95 13.3,31.3 13.7,30.9 17.5,30.9 18.5,29.9 18.5,27.1 16.88,25.48 U5.20 14.38,25.48 C24.1
VDD4P2: length 1.8
  TOP w0.203: U1.101 41.5,26.6
VDDA (1.8V): length 19.1
  TOP w0.2: C30.1 38.85,19.6 42.25,23 U1.110 44.4,23 v1(45,23.6)
  TOP w0.203: U1.96 44.8,30.2 44.4,30.6
  BOTTOM w0.5: v1(43.6,30) 44.2,30 46.1,28.1 46.1,27.4 47.2,26.3 47.2,25.1 46.5,24.4 45.8,24.4 v1(45,23.6)
VDDD (1.2V): length 28.1
  TOP w0.2: 44.8,15.3 U1.1 44.8,12.7 C17.1
  TOP w0.203: U1.93 46,31.9 ; 45.6,31.9 U1.94
  TOP w0.3: 44.8,15.3 49.7,20.2
  TOP w0.4: 49.7,20.2 v1(49.7,20.8)
  BOTTOM w0.4: v1(46.1,32.3) 46.1,32.1 49.7,28.5 49.7,20.8 v1(49.7,20.8)
VDDIO (3.3V): length 116.5
  TOP w0.2: U1.95 45.2,28.8 45.6,28.4 ; 46.1,28.2 46.4,28.5 U1.92 ; 51.6,16 U1.18 C14.1
  TOP w0.203: 45.2,30.9 U1.95
  TOP w0.22: 44.8,31.3 45.2,30.9
  TOP w0.3: 37.3,51.6 34.3,51.6 32.7,53.2 17.1,53.2 15.8,51.9 15.8,50.1 15.1,49.4 12.6,49.4 11.7,48.5 4.3,48.5 3.91,48.89 R51.1 ; R18.1 24.8,10 25.2,9.6 27.1,9.6 29,7.7 34.6,7.7 v1(36.5,5.8) ; v1(31,17.7) 28.6,20.1 25.1,20.1 24.3,20.9 C47.1
  TOP w0.4: v1(41.1,4) 41.1,2 41.51,1.59 R15.1 R14.1 R13.1 ; U5.4 24.27,22.23 C47.1
  BOTTOM w0.3: v1(31,17.7) 41.4,17.7 43.45,19.75 v1(46.95,19.75)
  BOTTOM w0.4: v1(47.5,16.2) 47.5,15.2 43,10.7 43,5.5 41.5,4 v1(41.1,4) 40.6,4 40.1,4.5 37.8,4.5 v1(36.5,5.8)
  vias: v1(52.2,25.2) v1(52.2,22.1) v1(53.4,25.2) v1(53.4,22.1)
VDDIO_DRAM: length 55.4
  TOP w0.2: U1.45 57.3,20.6 ; U1.38 57.3,17.8 ; 44.3,24.6 U1.106 42.1,24.6 39.6,22.1 C23.1 ; U1.53 57.3,23.8
  TOP w0.3: C36.1 62.7,35.5 59.8,35.5 58.91,36.39 R6.1 ; 44.4,24.7 44.3,24.6
  TOP w0.4: v1(67,32.8) 66.77,32.8 66.52,32.55 U2.55 63.45,32.55 C38.1 C36.1 ; U2.18 77.75,36.45 ; U2.3 77.8,26.7 ; U2.15 77.7,34.5 ; U2.9 77.7,30.6 ; U2.33 77.7,46.2 ; v1(67.4,28.2) 66.77,28.2 66.32,28.65 U2.61 63.85,28.65 C39.1 ; U2.1 77.7,25.4
  BOTTOM w0.4: 67.6,25.5 67.6,28 v1(67.4,28.2) 67.6,28.4 67.6,32.2 v1(67,32.8)
  BOTTOM w0.5: 67.6,25.5 62.5,20.4 v1(56.7,20.4)
VDDXTAL (1.0V): length 6.7
  TOP w0.2: C32.1 38.37,15.2 42.17,19 U1.120
EMI_A00: length 37.4
  TOP w0.203: v1(51.6,39.6) 52,39.2 52,34.3 52.8,33.5 U1.76 ; v1(69.6,43.4) 69.8,43.6 U2.29
  BOTTOM w0.203: v1(69.6,43.4) 68.6,42.4 66.1,42.4 65.4,43.1 56.05,43.1 52.55,39.6 v1(51.6,39.6)
EMI_A01: length 37.9
  TOP w0.203: v1(52,40.6) 52.4,40.2 52.4,34.5 53.2,33.7 U1.75 ; v1(68.5,43.6) 69.15,44.25 U2.30
  BOTTOM w0.203: v1(68.5,43.6) 67.7,42.8 66.4,42.8 65.7,43.5 55.7,43.5 52.8,40.6 v1(52,40.6)
EMI_A02: length 38
  TOP w0.203: U1.74 53.6,33.9 52.8,34.7 52.8,41.2 v1(52.4,41.6) ; v1(67.3,43.6) 68.6,44.9 U2.31
  BOTTOM w0.203: v1(67.3,43.6) 66.35,43.6 66.05,43.9 55.33,43.9 53.03,41.6 v1(52.4,41.6)
EMI_A03: length 38.2
  TOP w0.203: U1.73 54,34.1 53.2,34.9 53.2,42.2 v1(52.8,42.6) ; v1(68,45.55) U2.32
  BOTTOM w0.203: v1(52.8,42.6) 54.55,44.34 66.8,44.34 v1(68,45.55)
EMI_A04: length 37.8
  TOP w0.203: U1.72 54.4,34.3 53.59,35.11 53.59,46.7 arc(53.97,47.62) 54.89,48 64.7,48 arc(64.9,47.8) 64.7,47.59 63.1,47.59 arc(62.9,47.39) 63.1,47.19 64.5,47.19 arc(64.7,46.98) 64.5,46.78 63.5,46.78 arc(63.36,46.72) 63.3,46.58 63.3,46.5 arc(63.34,46.32) 63.44,46.16 63.85,45.75 arc(64.07,45.6) 64.34,45.55 U2.35
EMI_A05: length 36.5
  TOP w0.203: U2.36 64.1,44.9 62.81,46.19 arc(62.66,46.42) 62.6,46.7 arc(62.34,47.34) 61.7,47.6 54.99,47.6 arc(54.28,47.31) 53.99,46.6 53.99,35.4 arc(54.19,35.2) 54.39,35.4 54.39,38 arc(54.6,38.2) 54.8,38 U1.71
EMI_A06: length 36.6
  TOP w0.203: U2.37 64.15,44.25 62.41,45.99 arc(62.26,46.22) 62.2,46.5 62.2,46.7 arc(62.05,47.05) 61.7,47.2 54.99,47.2 arc(54.56,47.02) 54.39,46.6 54.39,38.8 arc(54.59,38.6) 54.79,38.8 54.79,41.7 arc(55,41.9) 55.2,41.7 U1.70
EMI_A07: length 35.5
  TOP w0.203: U1.69 55.6,42.2 54.8,43 54.8,46.2 arc(55,46.4) 55.21,46.2 55.21,43.3 arc(55.41,43.1) 55.61,43.3 55.61,46.4 arc(55.73,46.68) 56.01,46.8 61.5,46.8 arc(61.71,46.71) 61.8,46.5 61.8,46.2 arc(61.84,46.02) 61.94,45.86 62.7,45.1 63.9,43.9 64.2,43.6 U2.38
EMI_A08: length 37.9
  TOP w0.203: U2.39 64.25,42.95 62,45.2 60.67,45.2 60.47,45.4 60.47,46.2 arc(60.26,46.4) 60.06,46.2 60.06,45.4 arc(59.86,45.2) 59.65,45.4 59.65,46.2 arc(59.45,46.4) 59.25,46.2 59.25,45.4 arc(59.05,45.2) 58.84,45.4 58.84,46.2 arc(58.64,46.4) 58.44,46.2 58.44,45.4 arc(58.23,45.2) 58.03,45.4 58.03,46.2 arc(57.83,46.4) 57.62,46.2 57.62,45.4 arc(57.42,45.2) 57.22,45.4 57.22,46.2 arc(57.02,46.4) 56.81,46.2 56.81,45.4 arc(56.61,45.2) 56.41,45.4 56.41,46.2 arc(56.2,46.4) 56,46.2 U1.68
EMI_A09: length 34.9
  TOP w0.203: U2.40 64.3,42.3 62.61,43.99 61.85,44.75 arc(61.78,44.8) 61.7,44.81 56.7,44.81 arc(56.5,44.61) 56.7,44.41 61.6,44.41 arc(61.8,44.2) 61.6,44 56.8,44 arc(56.52,43.88) 56.4,43.6 U1.67
EMI_A10: length 38
  TOP w0.203: U1.66 56.8,42.3 arc(56.95,42.65) 57.3,42.8 58.6,42.8 arc(58.8,43) 58.6,43.21 57,43.21 arc(56.8,43.41) 57,43.61 61.6,43.61 arc(61.96,43.54) 62.26,43.34 62.7,42.9 63.2,42.4 v1(63.2,42.3) ; U2.28 71.05,42.95 v1(70.9,42.8)
  BOTTOM w0.203: v1(70.9,42.8) 70,42.8 69.2,42 65.7,42 65.4,42.3 v1(63.2,42.3)
EMI_A11: length 36.5
  TOP w0.203: U2.41 64.15,41.65 63.7,41.2 62.7,41.2 arc(62.35,41.35) 62.2,41.7 62.2,42.52 arc(61.99,43.02) 61.5,43.22 59.4,43.22 arc(59.2,43.02) 59.4,42.82 61.5,42.82 arc(61.7,42.61) 61.5,42.41 57.4,42.41 arc(57.2,42.21) 57.4,42.01 61.6,42.01 arc(61.8,41.8) 61.6,41.6 57.6,41.6 arc(57.32,41.48) 57.2,41.2 U1.65
EMI_A12: length 37.8
  TOP w0.203: U1.64 58,28.2 57.6,28.6 57.6,39.4 arc(57.8,39.6) 58.01,39.4 58.01,38.9 arc(58.21,38.7) 58.41,38.9 58.41,39.4 arc(58.62,39.6) 58.82,39.4 58.82,38.9 arc(59.02,38.7) 59.22,38.9 59.22,39.4 arc(59.43,39.6) 59.63,39.4 59.63,38.9 arc(59.83,38.7) 60.04,38.9 60.04,39.6 arc(59.92,39.88) 59.64,40 57.9,40 arc(57.7,40.2) 57.9,40.41 61.2,40.41 arc(61.4,40.61) 61.2,40.81 58,40.81 arc(57.8,41.02) 58,41.22 61.68,41.22 arc(61.91,41.12) 62,40.9 62,40.7 arc(62.09,40.49) 62.3,40.4 63.7,40.4 64.3,41 U2.42
EMI_BA0: length 36.8
  TOP w0.203: v1(51.2,37.7) 50.2,36.7 50.2,34.3 51.6,32.9 U1.79 ; v1(72,41.4) 72.63,41.4 72.88,41.65 U2.26
  BOTTOM w0.203: v1(51.2,37.7) 52,37.7 56.6,42.3 61.3,42.3 62.5,41.1 70.9,41.1 71.2,41.4 v1(72,41.4)
EMI_BA1: length 38.1
  TOP w0.203: U2.27 71.7,42.3 71.3,41.9 v1(70.3,41.9) ; v1(50.8,38.7) 49.8,37.7 49.8,34.1 51.2,32.7 U1.80
  BOTTOM w0.203: v1(50.8,38.7) 52.3,38.7 56.3,42.7 61.7,42.7 62.9,41.5 69.9,41.5 v1(70.3,41.9)
EMI_CASN: length 36
  TOP w0.203: U1.61 v1(56.5,27) ; v1(73.1,38.7) 73.8,38.7 74.15,39.05 U2.22
  BOTTOM w0.203: v1(73.1,38.7) 70.6,38.7 69.8,39.5 66.13,39.5 61.83,35.2 58.3,35.2 56.5,33.4 56.5,32.6 arc(56.56,32.47) 56.69,32.41 57.21,32.41 arc(57.4,32.22) 57.21,32.03 56.69,32.03 arc(56.5,31.84) 56.69,31.65 57.21,31.65 arc(57.4,31.46) 57.21,31.27 56.69,31.27 arc(56.5,31.08) 56.69,30.89 57.21,30.89 arc(57.4,30.7) 57.21,30.51 56.69,30.51 arc(56.56,30.45) 56.5,30.32 v1(56.5,27)
EMI_CE0N: length 39.4
  TOP w0.2: R5.2 78.14,40.35 U2.24
  TOP w0.203: v1(54.6,28.1) 55.05,28.55 56.93,28.55 57.67,27.8 U1.63 ; U2.24 74.05,40.35 73.7,40.7 v1(73,40.7)
  BOTTOM w0.203: v1(54.6,28.1) 54.6,28.89 arc(54.54,29.03) 54.41,29.08 53.99,29.08 arc(53.8,29.27) 53.99,29.46 54.41,29.46 arc(54.6,29.66) 54.41,29.85 53.99,29.85 arc(53.8,30.04) 53.99,30.23 54.41,30.23 arc(54.54,30.28) 54.6,30.42 54.6,32.73 57.86,35.99 61.43,35.99 65.71,40.28 70.32,40.28 71,39.59 71.89,39.59 v1(73,40.7)
EMI_CKE: length 46.3
  TOP w0.2: U2.44 66.2,39.7 66.5,40 66.5,45.1 67.2,45.8 67.2,47.29 R9.1
  TOP w0.203: v1(61,39.5) 61.4,39.9 64.1,39.9 64.3,39.7 U2.44 ; v1(50.9,35.6) 50.9,34.2 52,33.1 U1.78
  BOTTOM w0.203: v1(50.9,35.6) 51.5,35.6 55.4,39.5 59.5,39.5 arc(59.7,39.7) 59.5,39.91 56.4,39.91 arc(56.2,40.11) 56.4,40.31 58.9,40.31 arc(59.1,40.52) 58.9,40.72 56.7,40.72 arc(56.5,40.92) 56.7,41.12 59.38,41.12 v1(61,39.5)
EMI_CLK: length 39.2
  TOP w0.203: U1.36 58.76,16.99 59.71,16.99 60.89,15.81 64.69,15.81 65.08,16.2 v1(66.2,16.2) ; v1(68.2,38.5) 68.03,38.33 67.3,38.33 66.7,38.93 66.29,38.93 66.17,39.05 U2.45 ; 65.13,39.01 U2.45 ; U2.45 63.56,39.05 R8.2
  BOTTOM w0.203: v1(68.2,38.5) 68.49,38.21 69.57,38.21 70.66,37.12 70.66,35.35 70.65,35.35 70.65,21.28 66.4,17.02 66.4,16.4 v1(66.2,16.2)
EMI_CLKN: length 38.4
  TOP w0.203: R8.1 64.21,38.4 U2.46 66.17,38.4 66.29,38.52 66.53,38.52 67.13,37.92 67.78,37.92 v1(68.2,37.5) ; U1.37 59.88,17.4 61.06,16.22 64.52,16.22 64.7,16.4 64.7,16.8 64.9,17 65.4,17 v1(65.42,16.98)
  BOTTOM w0.203: v1(65.42,16.98) 65.4,17 65.4,17.6 65.59,17.79 66.59,17.79 70.25,21.45 70.25,35.52 70.25,36.95 69.4,37.8 68.5,37.8 v1(68.2,37.5)
EMI_D00: length 36.8
  TOP w0.203: U1.41 60.2,19 60.8,18.4 70,18.4 70.91,19.3 75.4,19.3 arc(75.6,19.1) 75.4,18.9 73.4,18.9 arc(73.2,18.7) 73.4,18.49 77.79,18.49 78.5,19.2 78.5,23.3 78,23.8 75.4,23.8 75.2,24 75.2,25.8 75.45,26.05 U2.2
EMI_D01: length 35.6
  TOP w0.203: U1.43 60.6,19.8 61.2,19.2 69.73,19.2 70.59,20.06 76.2,20.06 arc(76.55,20.21) 76.7,20.56 76.7,22.3 arc(76.9,22.5) 77.11,22.3 77.11,20.4 arc(77.31,20.2) 77.51,20.4 77.51,22.69 arc(77.42,22.91) 77.2,23 74.7,23 74.2,23.5 74.2,27 74.55,27.35 U2.4
EMI_D02: length 36.6
  TOP w0.203: U2.5 75.2,28 v1(75,28.2) ; v1(75,26.6) 74.6,26.2 74.6,23.9 75.1,23.4 77.7,23.4 78,23.1 78,19.3 77.57,18.87 76.4,18.87 arc(76.2,19.07) 76.4,19.28 77.3,19.28 arc(77.5,19.48) 77.3,19.68 70.75,19.68 69.87,18.8 61,18.8 60.4,19.4 U1.42
  BOTTOM w0.203: v1(75,26.6) v1(75,28.2)
EMI_D03: length 36.4
  TOP w0.203: U1.44 60.8,20.2 61.4,19.6 69.6,19.6 70.44,20.44 74.3,20.44 arc(74.51,20.53) 74.6,20.74 74.6,21.9 arc(74.8,22.1) 75.01,21.9 75.01,20.7 arc(75.21,20.5) 75.41,20.7 75.41,21.9 arc(75.61,22.1) 75.82,21.9 75.82,20.7 arc(76.02,20.5) 76.22,20.7 76.22,22.2 arc(76.11,22.48) 75.82,22.6 74.3,22.6 73.8,23.1 73.8,27.4 74.2,27.8 74.2,28.5 75,29.3 U2.7
EMI_D04: length 36.1
  TOP w0.203: U2.8 74.45,29.95 arc(74.27,29.88) 74.2,29.7 74.2,29.18 arc(74.15,29.05) 74.02,29 arc(73.88,29.06) 73.82,29.2 73.82,30.7 arc(73.61,30.9) 73.41,30.7 73.41,29.1 arc(73.21,28.9) 73.01,29.1 73.01,30.7 arc(72.8,30.9) 72.6,30.7 72.6,21.94 arc(72.63,21.81) 72.7,21.7 arc(72.81,21.63) 72.94,21.6 72.94,21.6 73.5,21.6 arc(73.7,21.4) 73.5,21.2 70.12,21.2 69.33,20.4 61.8,20.4 60.8,21.4 U1.47
EMI_D05: length 37.5
  TOP w0.203: U1.48 61,21.8 62,20.8 69.19,20.8 69.97,21.57 71.17,21.57 72.2,22.6 72.2,32.9 arc(72.4,33.1) 72.61,32.9 72.61,31.5 arc(72.81,31.3) 73.01,31.5 73.01,32.7 arc(73.22,32.9) 73.42,32.7 73.42,31.5 arc(73.62,31.3) 73.82,31.5 73.82,32.4 arc(74.03,32.6) 74.23,32.4 74.23,30.6 arc(74.43,30.4) 74.64,30.6 74.64,30.81 arc(74.77,31.12) 75.08,31.25 U2.10
EMI_D06: length 37.8
  TOP w0.203: U1.49 61.2,22.2 62.2,21.2 69.06,21.2 69.81,21.95 70.95,21.95 71.8,22.8 71.8,34.5 72.4,35.1 73.7,35.1 arc(73.9,34.9) 73.7,34.69 72.8,34.69 arc(72.6,34.49) 72.8,34.29 73.7,34.29 arc(73.9,34.09) 73.7,33.88 72.9,33.88 arc(72.7,33.68) 72.9,33.48 73.7,33.48 arc(73.84,33.42) 73.9,33.27 arc(73.98,33.08) 74.17,33 74.5,33 arc(74.65,32.94) 74.71,32.79 74.71,32.1 arc(74.77,31.96) 74.91,31.9 U2.11
EMI_D07: length 37.5
  TOP w0.203: U2.13 75.31,33.2 arc(75.17,33.26) 75.11,33.4 75.11,34.4 arc(74.91,34.6) 74.71,34.4 74.71,33.6 arc(74.5,33.4) 74.3,33.6 74.3,35.2 arc(74.21,35.41) 74.01,35.49 73.6,35.49 arc(73.4,35.7) 73.6,35.9 74.1,35.9 arc(74.24,35.96) 74.3,36.1 arc(74.24,36.24) 74.1,36.3 72.9,36.3 71.4,34.8 71.4,23 70.73,22.33 69.65,22.33 68.92,21.6 62.4,21.6 61.4,22.6 U1.50
EMI_D08: length 35.3
  TOP w0.203: U2.54 66.1,33.2 66.6,33.7 67.2,33.7 68.2,34.7 arc(68.35,34.92) 68.4,35.18 68.4,35.6 arc(68.47,35.97) 68.68,36.28 69.6,37.2 arc(69.82,37.35) 70.08,37.4 70.7,37.4 arc(70.91,37.31) 71,37.1 71,23.2 70.51,22.71 69.5,22.71 68.79,22 62.6,22 61.6,23 U1.51
EMI_D09: length 34.8
  TOP w0.203: U1.52 61.8,23.4 62.8,22.4 68.65,22.4 69.34,23.09 70.19,23.09 70.6,23.5 70.6,36.6 arc(70.51,36.81) 70.3,36.9 70.1,36.9 arc(69.92,36.86) 69.76,36.76 69.6,36.6 69.04,36.04 arc(68.94,35.88) 68.9,35.7 68.9,35.12 arc(68.82,34.73) 68.6,34.4 67.8,33.6 67.8,32.5 67.3,32 66.25,32 66.15,31.9 U2.56
EMI_D10: length 32.7
  TOP w0.203: U1.54 61.6,24.2 63,22.8 68.52,22.8 69.18,23.46 69.82,23.46 70.2,23.84 70.2,35.6 arc(70.11,35.81) 69.9,35.9 69.6,35.9 arc(69.39,35.81) 69.3,35.6 69.3,34.78 arc(69.25,34.52) 69.1,34.3 68.4,33.6 arc(68.25,33.38) 68.2,33.12 68.2,32.2 67.5,31.5 66.3,31.5 66.05,31.25 U2.57
EMI_D11: length 31
  TOP w0.203: U1.55 61.8,24.6 63.2,23.2 68.38,23.2 69.02,23.84 69.44,23.84 69.8,24.2 69.8,33.5 arc(69.6,33.7) 69.39,33.5 69.39,32.29 arc(69.34,32.16) 69.2,32.1 arc(69.06,32.16) 69,32.3 69,33.1 arc(68.8,33.3) 68.59,33.1 68.6,33.09 68.6,32 67.31,30.7 67.31,30.2 67,29.89 66.2,29.89 66.15,29.95 U2.59
EMI_D12: length 35.7
  TOP w0.203: U2.60 67.39,29.3 arc(67.67,29.42) 67.79,29.7 67.79,30.3 arc(67.99,30.5) 68.19,30.3 68.19,27 arc(68.12,26.62) 67.91,26.31 67.25,25.65 arc(67.14,25.48) 67.1,25.29 67.1,24.7 arc(67.3,24.5) 67.51,24.7 67.51,25.2 arc(67.71,25.4) 67.91,25.2 67.91,24.99 arc(68.11,24.79) 68.32,24.99 68.32,26 arc(68.34,26.11) 68.4,26.2 arc(68.55,26.42) 68.6,26.68 68.6,30.6 68.7,30.7 68.9,30.7 69,30.6 69,25 68,24 63.6,24 62.2,25.4 U1.57
EMI_D13: length 36.8
  TOP w0.203: U1.58 60.7,25.8 61.4,26.5 61.4,30.6 arc(61.22,31.02) 60.8,31.2 59.8,31.2 arc(59.6,31.4) 59.8,31.61 61,31.61 arc(61.2,31.81) 61,32.01 59.8,32.01 arc(59.6,32.22) 59.8,32.42 61.1,32.42 arc(61.3,32.62) 61.1,32.82 59.8,32.82 arc(59.6,33.03) 59.8,33.23 61.3,33.23 arc(61.65,33.08) 61.8,32.73 61.8,27.4 63.1,26.1 63.1,25.1 63.8,24.4 66.2,24.4 66.7,24.9 66.7,25.7 67.4,26.4 67.4,27.1 67,27.5 66.6,27.5 66.1,28 U2.62
EMI_D14: length 37.5
  TOP w0.203: U1.60 60.3,26.6 60.6,26.9 60.6,29.9 arc(60.45,30.25) 60.1,30.4 58.7,30.4 arc(58.5,30.2) 58.7,29.99 59.7,29.99 arc(59.9,29.79) 59.7,29.59 58.7,29.59 arc(58.5,29.38) 58.7,29.18 59.2,29.18 arc(59.4,28.98) 59.2,28.78 58.4,28.78 arc(58.12,28.89) 58,29.18 58,34.9 arc(58.2,35.1) 58.41,34.9 58.41,33.2 arc(58.61,33) 58.81,33.2 58.81,34.6 arc(58.93,34.88) 59.21,35 62.2,35 arc(62.48,34.88) 62.6,34.6 62.6,27.8 63.05,27.35 U2.63
EMI_D15: length 37.5
  TOP w0.203: U2.65 66.15,26.05 66.2,26 66.2,26 66.3,25.9 66.3,25.1 66,24.8 64,24.8 63.5,25.3 63.5,26.3 62.2,27.6 62.2,34.21 arc(62.11,34.42) 61.9,34.51 59.6,34.51 arc(59.4,34.31) 59.6,34.1 61.5,34.1 arc(61.64,34.04) 61.7,33.9 arc(61.64,33.76) 61.5,33.7 59.61,33.7 arc(59.33,33.58) 59.21,33.3 59.21,31.4 arc(59.01,31.2) 58.81,31.4 58.81,32.4 arc(58.6,32.6) 58.4,32.4 58.4,31.1 arc(58.49,30.89) 58.7,30.8 60.2,30.8 arc(60.77,30.57) 61,30 61,26.7 60.5,26.2 U1.59
EMI_DQM0: length 37.4
  TOP w0.203: v1(73.4,28.2) 73.4,22.6 arc(73.55,22.25) 73.9,22.1 arc(74.11,22.01) 74.2,21.8 74.2,21.1 arc(74.12,20.9) 73.92,20.82 70.28,20.82 69.46,20 61.6,20 60.6,21 U1.46 ; U2.20 75.25,37.75 v1(74.9,37.4)
  BOTTOM w0.203: v1(74.9,37.4) 74.9,36.1 74.7,35.9 74.2,35.9 74,36.1 74,36.5 73.84,36.66 73.56,36.66 73.4,36.5 v1(73.4,28.2)
EMI_DQM1: length 36.5
  TOP w0.203: v1(67.8,36.4) 66.45,37.75 U2.47 ; U1.56 62,25 63.4,23.6 68.2,23.6 69.4,24.8 69.4,31 v1(69,31.4)
  BOTTOM w0.203: v1(69,31.4) 69.51,31.91 69.51,36.3 arc(69.31,36.5) 69.11,36.3 69.11,32.4 arc(68.9,32.2) 68.7,32.4 68.7,35.86 68.16,36.4 v1(67.8,36.4)
EMI_DQS0: length 38.2
  TOP w0.203: v1(71.2,18.6) 70.6,18 65.2,18 64,16.8 61.23,16.8 59.83,18.2 U1.39 ; U2.16 75.05,35.15 74.8,35.4 74.8,36.3 73.8,37.3 72.7,37.3 v1(71.8,36.4)
  BOTTOM w0.203: v1(71.8,36.4) 71.8,19.2 v1(71.2,18.6)
EMI_DQS1: length 38.3
  TOP w0.203: U1.40 60,18.6 61,17.6 v1(63.6,17.6) ; v1(67.6,35.15) 67.35,35.4 66.4,35.4 66.15,35.15 U2.51
  BOTTOM w0.203: v1(67.6,35.15) 68.2,34.55 68.2,23.7 arc(68.14,23.4) 67.97,23.15 64.06,19.23 arc(64,19.09) 64.06,18.94 arc(64.2,18.88) 64.34,18.94 67.8,22.4 arc(68.1,22.4) 68.1,22.1 v1(63.6,17.6)
EMI_RASN: length 37.1
  TOP w0.203: U1.62 57.4,27.4 57,27.8 v1(55.7,27.8) ; v1(73.7,39.7) U2.23
  BOTTOM w0.203: v1(55.7,27.8) 55.7,29.78 arc(55.64,29.92) 55.51,29.97 55.19,29.97 arc(55,30.16) 55.19,30.35 55.51,30.35 arc(55.7,30.54) 55.51,30.73 55.19,30.73 arc(55,30.93) 55.19,31.12 55.51,31.12 arc(55.7,31.31) 55.51,31.5 55.19,31.5 arc(55,31.69) 55.19,31.88 55.51,31.88 arc(55.7,32.07) 55.51,32.26 55.19,32.26 arc(55,32.45) 55.19,32.64 55.51,32.64 arc(55.64,32.69) 55.7,32.83 55.7,33.3 57.99,35.59 61.63,35.59 65.93,39.9 70,39.9 70.8,39.1 72.2,39.1 72.8,39.7 v1(73.7,39.7)
EMI_WEN: length 37.6
  TOP w0.203: U1.77 52.4,33.3 51.6,34.1 51.6,35.5 51.6,35.51 51.6,36.09 51.6,36.1 51.6,36.2 v1(51.2,36.6) ; v1(71.4,40.5) 71.84,40.05 71.84,38.36 72.3,37.9 73.9,37.9 74.4,38.4 U2.21
  BOTTOM w0.203: v1(51.2,36.6) 51.65,37.05 51.95,37.05 56.8,41.9 61,41.9 62.2,40.7 70.57,40.7 70.77,40.5 v1(71.4,40.5)
GPMI_ALE: length 76.9
  TOP w0.2: U1.20 52.4,9.2 53.7,7.9 64,7.9 66.9,10.8 68.3,10.8 69.7,12.2 v1(72.2,12.2)
  BOTTOM w0.2: v1(72.2,12.2) 74.1,14.1 80.6,14.1 81.7,15.2 81.7,34 82.9,35.2 82.9,39.7 83.3,40.1 83.3,46.1 84.5,47.3 85.9,47.3 86.4,46.8 86.4,45.06 J1.29
GPMI_CE0N: length 74.9
  TOP w0.2: v1(51.6,27) 50.4,28.2 U1.82 ; v1(50.1,42.1) 50.5,42.1 52.6,44.2 52.6,47.8 55.3,50.5 55.3,52 56,52.7 80.4,52.7 86.3,46.8 86.3,40.1 87.75,38.65 J1.25
  BOTTOM w0.2: v1(50.1,42.1) 48.8,40.8 48.8,34.64 51.61,31.83 51.61,29.72 51.6,29.71 51.6,28.09 51.6,28.09 51.6,27.51 51.6,27.5 v1(51.6,27)
GPMI_CE1N: length 69.8
  TOP w0.2: U1.81 50.8,28.6 51.5,27.9 52.2,27.9 v1(52.3,27.8) ; J1.26 83.7,40.14 83.7,48.1 79.9,51.9 57.3,51.9 53,47.6 53,44 v1(50.1,41.1)
  BOTTOM w0.2: v1(50.1,41.1) 49.2,40.2 49.2,34.84 52.01,32.03 52.01,28.7 52.3,28.41 v1(52.3,27.8)
GPMI_CLE: length 71.3
  TOP w0.2: v1(52.7,16.2) 52,15.5 U1.19
  BOTTOM w0.2: J1.31 86.3,47.7 84.3,47.7 82.9,46.3 82.9,40.3 82.5,39.9 82.5,36.9 80.7,35.1 80.7,15.8 80,15.1 73.46,15.1 72.36,14 65.44,14 60.84,18.6 55.1,18.6 v1(52.7,16.2)
GPMI_D00: length 45.5
  TOP w0.2: U1.22 53.2,10.4 55.3,8.3 63.8,8.3 66.7,11.2 68.1,11.2 69.8,12.9 78.9,12.9 83.2,17.2 83.2,19 83.8,19.6 86.5,19.6 J1.11
GPMI_D01: length 42.8
  TOP w0.2: U1.23 53.6,10.6 55.5,8.7 63.6,8.7 66.5,11.6 67.9,11.6 69.6,13.3 78.73,13.3 82.8,17.37 82.8,20.3 83.35,20.85 J1.12
GPMI_D02: length 46
  TOP w0.2: J1.13 86.46,22.1 83.2,22.1 82.4,21.3 82.4,17.5 80.1,15.2 80.09,15.2 78.59,13.7 69.4,13.7 67.7,12 66.3,12 63.4,9.1 55.7,9.1 54,10.8 U1.24
GPMI_D03: length 43.2
  TOP w0.2: U1.25 54.4,11 55.9,9.5 63.2,9.5 66.1,12.4 67.5,12.4 69.2,14.1 78.46,14.1 82,17.64 82,22.4 83,23.4 85.2,23.4 J1.14
GPMI_D04: length 46.7
  TOP w0.2: U1.27 55.2,11.4 56.3,10.3 62.8,10.3 65.7,13.2 67.1,13.2 68.8,14.9 78.2,14.9 81.2,17.9 81.2,23.9 84.3,27 86.68,27 J1.15
GPMI_D05: length 44.1
  TOP w0.2: U1.26 54.8,11.2 56.1,9.9 63,9.9 65.9,12.8 67.3,12.8 69,14.5 78.33,14.5 81.6,17.77 81.6,23.7 83.83,25.93 J1.16
GPMI_D06: length 46.7
  TOP w0.2: U1.29 56,11.8 56.7,11.1 62.4,11.1 65.3,14 66.7,14 68.4,15.7 77.8,15.7 80.4,18.3 80.4,24.3 84.1,28 84.1,29 84.7,29.6 86.62,29.6 J1.17
GPMI_D07: length 43.5
  TOP w0.2: U1.28 55.6,11.6 56.5,10.7 62.6,10.7 65.5,13.6 66.9,13.6 68.6,15.3 78,15.3 80.8,18.1 80.8,24.1 85.17,28.47 J1.18
GPMI_R/B#0: length 24.8
  TOP w0.2: v1(57.8,13.1) 57.4,13.1 57.2,13.3 U1.32
  BOTTOM w0.2: v1(57.8,13.1) 58.2,13.5 60.8,13.5 68.2,6.1 75.52,6.1 J3.6
GPMI_R/B#1: length 25.8
  TOP w0.2: v1(53.2,9.4) 52.8,9.8 U1.21
  BOTTOM w0.2: J3.2 71.24,5.3 67.8,5.3 63.7,9.4 v1(53.2,9.4)
GPMI_RE#: length 24
  TOP w0.2: v1(58.9,11.8) 58.5,11.8 57.95,12.35 57.45,12.35 56.8,13 U1.31
  BOTTOM w0.2: v1(58.9,11.8) 58.9,12.6 59.4,13.1 60.6,13.1 68,5.7 73.38,5.7 J3.4
GPMI_WE#:: length 28.8
  TOP w0.2: U1.33 59.5,15.8 61,14.3 v1(62.5,14.3)
  BOTTOM w0.2: v1(62.5,14.3) 62.5,13 68.6,6.9 79.8,6.9 J3.10
GPMI_WP#: length 26.8
  TOP w0.2: v1(61.7,15.1) 60.93,15.1 59.83,16.2 U1.34
  BOTTOM w0.2: J3.8 77.66,6.5 68.4,6.5 61.7,13.2 v1(61.7,15.1)
HP_L: length 50.1
  TOP w0.2: FB6.1 13.96,39.52 R23.1 v1(13.99,40.49) ; U1.113 41.6,21.8 38.6,18.8 32.3,18.8 27.9,23.2 27.9,35 v1(28.2,35.3)
  BOTTOM w0.2: v1(28.2,35.3) 28.2,36.2 25.1,39.3 15.18,39.3 v1(13.99,40.49)
HP_R: length 44.4
  TOP w0.2: FB5.1 21.93,39.5 R24.1 v1(20.41,40.49) ; U1.109 42.1,23.4 39.1,20.4 31.3,20.4 28.3,23.4 28.3,34.3 v1(29.8,35.8)
  BOTTOM w0.2: v1(20.41,40.49) 20.8,40.1 25.5,40.1 v1(29.8,35.8)
HP_VGND: length 49.4
  TOP w0.2: v1(31.6,21.4) 30.9,21.4 28.7,23.6 28.7,33.6 v1(29.4,34.3) ; R23.2 17.12,39.5 FB7.1 17.27,39.5 R24.2 v1(18.79,40.49) ; 44.6,22.6 U1.111
  TOP w0.3: v1(45.4,22.6) 44.6,22.6
  BOTTOM w0.2: v1(45.4,22.6) 45.3,22.5 38.8,22.5 37.7,21.4 v1(31.6,21.4) ; v1(29.4,34.3) 29.1,34.6 29.1,35.9 25.3,39.7 19.58,39.7 v1(18.79,40.49)
I2C_SCL: length 45.6
  TOP w0.2: U1.127 42.3,16.2 41.9,15.8 41.9,14.6 42.9,13.6 42.9,7.7 49.5,1.1 67.4,1.1 69.35,3.05 73.49,3.05 J3.3
I2C_SDA: length 47
  TOP w0.2: U1.128 42.5,15.8 42.3,15.6 42.3,14.8 43.3,13.8 43.3,7.9 49.7,1.5 67.2,1.5 69.15,3.45 75.63,3.45 J3.5
LCD_CS: length 79.1
  TOP w0.2: U1.10 48.4,8.2 51.5,5.1 65.4,5.1 68.3,8 69.4,8 70.5,9.1 76.1,9.1 v1(79.2,12.2)
  BOTTOM w0.2: v1(79.2,12.2) 81.1,12.2 83.3,14.4 83.3,33.2 84.7,34.6 85.6,34.6 86.5,35.5 86.5,36.6 87.2,37.3 88.2,37.3 88.8,36.7 88.8,32.06 J1.19
LCD_D00: length 62.2
  TOP w0.2: R15.2 42.5,3.7 v1(43.1,4.3) ; J1.3 86.56,9.5 84.7,9.5 83.2,8 80.2,8 78.05,5.85 71.8,5.85 70.75,4.8 69.9,4.8 67,1.9 49.9,1.9 44.2,7.6 v1(44.2,8.1) 44.2,8.6 45.2,9.6 U1.2
  BOTTOM w0.2: v1(44.2,8.1) 44.2,5.4 v1(43.1,4.3)
LCD_D01: length 53
  TOP w0.2: U1.3 45.6,9.4 44.9,8.7 44.9,7.5 50.1,2.3 66.8,2.3 69.7,5.2 70.6,5.2 71.7,6.3 77.9,6.3 80.31,8.71 R16.1 83.23,8.71 J1.4
LCD_D02: length 55.8
  TOP w0.2: U1.4 46,9.2 45.4,8.6 45.4,7.6 50.3,2.7 66.6,2.7 69.5,5.6 70.45,5.6 71.55,6.7 77.7,6.7 82.2,11.2 82.2,11.41 R17.1 86.33,11.81 J1.5
LCD_D03: length 58.6
  TOP w0.2: U1.5 46.4,8.4 v1(46.1,8.1) 46.3,7.9 46.3,7.3 50.5,3.1 66.4,3.1 69.3,6 70.3,6 71.4,7.1 77.5,7.1 81.5,11.1 81.5,12.5 82.2,13.2 85.18,13.2 J1.6 ; R14.2 44,4.1 v1(44.2,4.3)
  BOTTOM w0.2: v1(46.1,8.1) 46.1,6.2 v1(44.2,4.3)
LCD_D04: length 55.3
  TOP w0.2: U1.6 46.8,7.4 50.7,3.5 66.2,3.5 69.1,6.4 70.1,6.4 71.2,7.5 77.3,7.5 81.1,11.3 81.1,12.7 82.9,14.5 86.48,14.5 J1.7
LCD_D05: length 51.9
  TOP w0.2: J1.8 83.57,15.77 80.7,12.9 80.7,11.5 77.1,7.9 71.05,7.9 69.95,6.8 68.9,6.8 66,3.9 50.9,3.9 47.2,7.6 U1.7
LCD_D06: length 54.7
  TOP w0.2: J1.9 86.44,17 84.2,17 80.3,13.1 80.3,11.7 76.9,8.3 70.85,8.3 69.75,7.2 68.7,7.2 65.8,4.3 51.1,4.3 47.6,7.8 U1.8
LCD_D07: length 51.3
  TOP w0.2: U1.9 48,8 51.3,4.7 65.6,4.7 68.5,7.6 69.6,7.6 70.7,8.7 76.7,8.7 79.9,11.9 79.9,13.3 84.91,18.31 J1.10
LCD_DOTCLK: length 58.5
  TOP w0.2: R12.2 82.6,34.51 v1(81.9,35.21) ; U1.17 51.2,15.4 v1(50.4,16.2)
  BOTTOM w0.2: v1(81.9,35.21) 81.8,35.11 81.8,35.1 81.2,34.5 81.2,15.5 80.28,14.58 73.73,14.58 72.63,13.48 65.36,13.48 60.73,18.1 55.7,18.1 53,15.4 51.2,15.4 v1(50.4,16.2)
LCD_EN: length 113.8
  TOP w0.2: R52.1 v1(53.3,51.4) ; J1.28 85.21,41.19 84.1,42.3 84.1,48.4 80.2,52.3 56.7,52.3 v1(56.3,51.9) ; v1(78.2,12.2) 75.5,9.5 70.3,9.5 69.2,8.4 68.1,8.4 65.2,5.5 51.7,5.5 48.8,8.4 U1.11
  BOTTOM w0.2: v1(78.2,12.2) 78.9,12.9 81.2,12.9 82.9,14.6 82.9,33.4 84.1,34.6 84.1,39.1 85.21,40.21 J1.28 ; v1(56.3,51.9) 55.8,51.4 v1(53.3,51.4)
LCD_HSYNC: length 71.2
  TOP w0.2: U1.15 50.4,9.2 51.9,7.7 52.7,7.7 53.3,7.1 64.4,7.1 67.3,10 68.6,10 69.7,11.1 73.1,11.1 v1(74.2,12.2)
  BOTTOM w0.2: v1(74.2,12.2) 75.3,13.3 81,13.3 82.5,14.8 82.5,33.6 83.7,34.8 83.7,39.3 84.1,39.7 84.1,42.6 J1.30
LCD_RESET: length 69.7
  TOP w0.2: v1(77.2,12.2) 74.9,9.9 70.15,9.9 69.05,8.8 67.9,8.8 65,5.9 51.9,5.9 49.2,8.6 U1.12
  BOTTOM w0.2: J1.23 86.5,34.84 86.5,33.1 85.9,32.5 84.4,32.5 83.7,31.8 83.7,14.2 81,11.5 77.9,11.5 v1(77.2,12.2)
LCD_RS: length 74.7
  TOP w0.2: v1(45.3,4.3) 45.5,4.1 R13.2 ; U1.14 50,9 52,7 v1(52.4,7) 52.7,6.7 64.6,6.7 67.5,9.6 68.75,9.6 69.85,10.7 73.7,10.7 v1(75.2,12.2)
  BOTTOM w0.2: v1(45.3,4.3) 48,7 v1(52.4,7) ; J1.20 86.5,29.72 86.5,12.6 85.8,11.9 82.6,11.9 81.4,10.7 76.7,10.7 v1(75.2,12.2)
LCD_VSYNC: length 72.6
  TOP w0.2: v1(73.2,12.2) 72.5,11.5 69.55,11.5 68.45,10.4 67.1,10.4 64.2,7.5 53.5,7.5 52.9,8.1 52.1,8.1 50.8,9.4 U1.16
  BOTTOM w0.2: J1.32 85.2,46.24 85.2,45.3 83.7,43.8 83.7,39.9 83.3,39.5 83.3,35 82.1,33.8 82.1,15 80.8,13.7 74.7,13.7 v1(73.2,12.2)
LCD_WR: length 67.1
  TOP w0.2: U1.13 49.6,8.8 52.1,6.3 64.8,6.3 67.7,9.2 68.9,9.2 70,10.3 74.3,10.3 v1(76.2,12.2)
  BOTTOM w0.2: J1.21 86.3,32.1 84.7,32.1 84.1,31.5 84.1,14 81.2,11.1 77.3,11.1 v1(76.2,12.2)
LI-ION_BATTERY: length 147.6
  TOP w0.2: S1.2 17.3,1.8 13.4,1.8 12.75,2.45 12.75,3.75 14.2,5.2 14.2,6.9 13.4,7.7 11.4,7.7 v1(10.6,6.9)
  TOP w0.203: U1.103 40.3,25.8 ; v1(45,27.1) 44.9,27 U1.100
  TOP w0.3: J9.1 32.5,33.5 32.5,37.4 35,39.9 35,50 32.5,52.5 17.5,52.5 16.5,51.5 16.5,49.7 15.5,48.7 13,48.7 12.1,47.8 3.8,47.8 0.7,44.7 0.7,23.7 2.3,22.1 v1(2.3,7.3)
  TOP w0.8: J9.1 31.93,31.07 C3.1
  BOTTOM w0.3: v1(10.6,6.9) 8.1,6.9 7,5.8 3.8,5.8 v1(2.3,7.3)
  BOTTOM w0.8: 37.3,27.1 37.2,27 v1(37.2,26) ; 37.3,27.1 35.9,27.1 J9.1 ; 37.3,27.1 v1(45,27.1)
LINE_IN_L: length 22.3
  TOP w0.2: C50.2 25.4,24.5 31.9,18 38.9,18 41.9,21 U1.115
LINE_IN_R: length 21.1
  TOP w0.2: U1.114 41.75,21.4 38.75,18.4 32.1,18.4 26.9,23.6 C49.2
LRADC0: length 56.3
  TOP w0.2: v1(44,14.1) 44.3,14.4 44.3,15.5 46.1,17.3 46.1,23.8 45.6,24.3 44.7,24.3 44.2,23.8 U1.108 ; R19.1 21.99,8.41 22.7,7.7 23.7,7.7 24.6,6.8 24.6,5.2 23.25,3.85 23.25,2.35 23.8,1.8 35.7,1.8 37.4,3.5 37.4,6.5 39.7,8.8 v1(41.3,8.8) ; R19.1 R18.2 ; R19.1 C7.1
  BOTTOM w0.2: v1(44,14.1) 44,12.5 41.3,9.8 v1(41.3,8.8)
LRADC1: length 28
  TOP w0.2: J9.2 31,34.5 29.1,32.6 29.1,23.8 30.7,22.2 31.9,22.2 32.9,21.2 39.3,21.2 42.3,24.2 U1.107
MIC: length 11.8
  TOP w0.2: U1.116 42.05,20.6 39.05,17.6 33.4,17.6 v2(32.9,17.1)
PSWITCH: length 10.7
  TOP w0.2: R39.1 35.11,16 38.6,16 42,19.4 U1.119
PWM0: length 81.2
  TOP w0.2: v1(11.2,21.8) 10.5,21.1 9.5,21.1 7.05,18.65 7.05,11.05 9.8,8.3 9.8,6.5 12.3,4 12.3,2.27 13.14,1.42 35.87,1.42 37.9,3.45 37.9,6.15 39.85,8.1 41.7,8.1 42.1,8.5 42.1,13.2 41,14.3 41,16.1 41.9,17 U1.125 ; v1(18,21.8) 19.5,21.8 21.02,20.27 U5.1
  BOTTOM w0.2: v1(11.2,21.8) v1(18,21.8)
PWM1: length 82.2
  TOP w0.2: 22.43,22.88 v1(18,22.88) ; v1(10.1,21.9) 9.7,21.9 6.65,18.85 6.65,10.85 9.4,8.1 9.4,6.3 11.8,3.9 11.8,2.2 12.95,1.05 12.98,1.05 12.99,1.05 36.03,1.05 36.03,1.05 36.1,1.05 38.3,3.25 38.3,5.95 40.05,7.7 41.9,7.7 42.5,8.3 42.5,13.4 41.4,14.5 41.4,15.9 42.1,16.6 U1.126
  BOTTOM w0.2: v1(18,22.88) 17.62,22.5 10.7,22.5 v1(10.1,21.9)
PWM2: length 85.9
  TOP w0.2: v1(47.2,27.7) 46.8,28.1 U1.91 ; v1(49.3,45.2) 51.4,45.2 51.8,45.6 51.8,48.2 54.5,50.9 54.5,52.4 55.6,53.5 80.8,53.5 86.9,47.4 88.3,47.4 88.9,46.8 88.9,38.2 88.2,37.5 86.6,37.5 85.21,36.11 J1.24
  BOTTOM w0.2: v1(47.2,27.7) 47.3,27.8 47.3,28.7 44.5,31.5 44.5,43.2 46.5,45.2 v1(49.3,45.2)
SERIAL_JTAG: length 27.1
  TOP w0.2: v1(50,44.5) 50.01,44.49 R4.1 ; U1.89 47.6,28.4 48,28 48,27.5 v1(48.4,27.1)
  BOTTOM w0.2: v1(50,44.5) 46.4,44.5 44.9,43 44.9,31.7 48,28.6 48,27.5 v1(48.4,27.1)
SSP1_CMD: length 26.1
  TOP w0.2: U3.3 v1(41.96,48.16) ; U1.83 50,33.3 49.4,33.9 49.4,41.1 48.3,42.2 48.3,45.7 v1(48.7,46.1)
  BOTTOM w0.2: v1(41.96,48.16) 41.96,48.14 44,46.1 v1(48.7,46.1)
SSP1_DATA0: length 22
  TOP w0.2: U3.7 v1(46.36,47.6) ; U1.84 49.6,33.1 49,33.7 49,40.9 47.9,42 47.9,46.8 v1(48.2,47.1)
  BOTTOM w0.2: v1(48.2,47.1) 46.9,47.1 46.4,47.6 v1(46.36,47.6)
SSP1_DATA1: length 20.4
  TOP w0.2: U1.85 49.2,32.9 48.6,33.5 48.6,40.7 47.46,41.84 U3.8
SSP1_DATA2: length 27.3
  TOP w0.2: U3.1 39.8,49.36 39.8,42.2 40.9,41.1 47.6,41.1 48.2,40.5 48.2,33.3 48.8,32.7 U1.86
SSP1_DATA3: length 25.2
  TOP w0.2: v1(48,31.5) 48.4,31.1 U1.87 ; U3.2 40.9,48.96 40.9,42.5 41.6,41.8 v1(46.5,41.8)
  BOTTOM w0.2: v1(46.5,41.8) 46.5,34 48,32.5 v1(48,31.5)
SSP1_DETECT: length 75.8
  TOP w0.2: v1(48.8,28.1) 48.6,28.3 48.3,28.3 48,28.6 U1.88 ; v1(49.3,43.8) 51.6,43.8 52.2,44.4 52.2,48 54.9,50.7 54.9,52.2 55.8,53.1 80.6,53.1 86.7,47 86.7,42.22 J1.27
  BOTTOM w0.2: v1(49.3,43.8) 46.3,43.8 45.3,42.8 45.3,31.9 48.8,28.4 v1(48.8,28.1)
SSP1_SCK: length 21.3
  TOP w0.2: U1.90 v1(47.2,32.2) ; v1(46.3,42.8) 46.3,45 44.16,47.14 U3.5
  BOTTOM w0.2: v1(47.2,32.2) 47.2,32.7 45.8,34.1 45.8,42.3 v1(46.3,42.8)
USB_D+: length 39.4
  TOP w0.2: J7.3 9.55,14.34 11.18,14.34 12.94,12.58 22.52,12.58 24.44,14.5 24.92,14.5 J8.3 27.08,14.5 31.1,14.5 31.83,13.77 38.67,13.77 40.29,15.39 40.29,15.94 41.75,17.4 U1.124
USB_D-: length 39.4
  TOP w0.2: J7.2 9.47,14.74 11.34,14.74 13.1,12.98 22.35,12.98 24.27,14.9 24.94,14.9 J8.2 27.06,14.9 31.27,14.9 32,14.17 38.47,14.17 39.89,15.59 39.89,16.11 41.58,17.8 U1.123
VDAC1: length 4.4
  TOP w0.203: U1.104 42.17,25.4 42.17,25.4 40.9,25.4 39.9,24.4 v2(39.9,23.8)
XTAL_IN: length 18.1
  TOP w0.2: 35,11.4 39.4,11.4 Y1.1 v1(40.5,13.7) ; 35,11.4 34.6,11.8 C34.1 ; 35,11.4 34.4,10.8 Q1.3 ; v1(44.8,17.8) 44.4,18.2 U1.122
  BOTTOM w0.2: v1(40.5,13.7) 40.5,14.1 44.2,17.8 v1(44.8,17.8)
XTAL_OUT: length 25.6
  TOP w0.2: Q2.3 28.4,9.2 29.4,8.2 35.6,8.2 C35.1 35.9,9.5 Y1.3 v1(37.9,10.1) ; U1.121 44.4,18.6 v1(44.8,19)
  BOTTOM w0.2: v1(44.8,19) 38.7,12.9 38.7,10.9 v1(37.9,10.1)
N37305: length 1.4
  TOP w0.203: U1.99 41.8,27.4
N50407: length 6.6
  TOP w0.2: U1.117 42.2,20.2 38.8,16.8 C33.1
N54014: length 7
  TOP w0.4: R6.2 58.9,37.9 60.4,36.4 R7.1 61.89,36.39 C37.1 C36.2 63.45,36.45 U2.49
N97880: length 20.4
  TOP w0.2: Q1.1 31.8,11.35 31.8,11.8 31.5,12.1 23.6,12.1 23,11.5 17.7,11.5 17.2,11 17.2,10.11 R10.2 C46.1 15.49,10.11 R11.1
N16793165: length 12.1
  TOP w0.2: J6.2 11.1,31.3 11.3,31.1 12.23,31.1 13.1,30.23 17.14,30.23 17.8,29.57 17.8,28.73 17.28,28.22 15.72,28.22 U5.16
N16793167: length 13
  TOP w0.2: J6.3 11.1,30.5 11.3,30.7 12.06,30.7 12.94,29.83 16.97,29.83 17.4,29.4 17.4,28.9 17.12,28.62 15.68,28.62 U5.15 13.69,28.73 R40.2
N16793210: length 3.6
  TOP w0.4: C48.1 R40.1 15.54,27.39 U5.17
N16793237: length 10.7
  TOP w0.2: C27.1 16.5,16.1 Y2.3 18.1,15.7 18.5,16.1 18.5,19.7 17.92,20.27 U5.28
N16793563: length 9.5
  TOP w0.2: U5.27 18.17,20.93 19.2,19.9 19.2,18.5 19.6,18.1 Y2.1 22.4,18.1 C31.1
N16801292: length 3
  TOP w0.2: R12.1 84.35,32.69 J1.22
N16805543: length 3.1
  TOP w0.4: J5.2 30.2,43.4 29.6,42.8 FB8.2
N16805561: length 17.1
  TOP w0.2: J5.4 26.2,50.9 ; 26.2,50.9 26.2,41.6 26,41.4 FB9.2 ; 26.2,50.9 J5.3
N16805563: length 2
  TOP w0.4: FB10.2 J5.1
